# Altium PCB NBP-28 Rev 1.00.PCBDOC (part 1 of 6)
Units mil, origin at the board's own origin, x right, y up, seen from the top; angles counter-clockwise.
Board outline 2716.54 x 3917.15 mil, 8 copper layers (Top Layer, MidLayer3, MidLayer1, VCC, Gnd, VCCINT, MidLayer2, Bottom Layer), stack 59.043 mil thick; 229 components, 429 nets, 1584 pads, 1020 vias.
Unrouted connection lines stored in the file: 302.
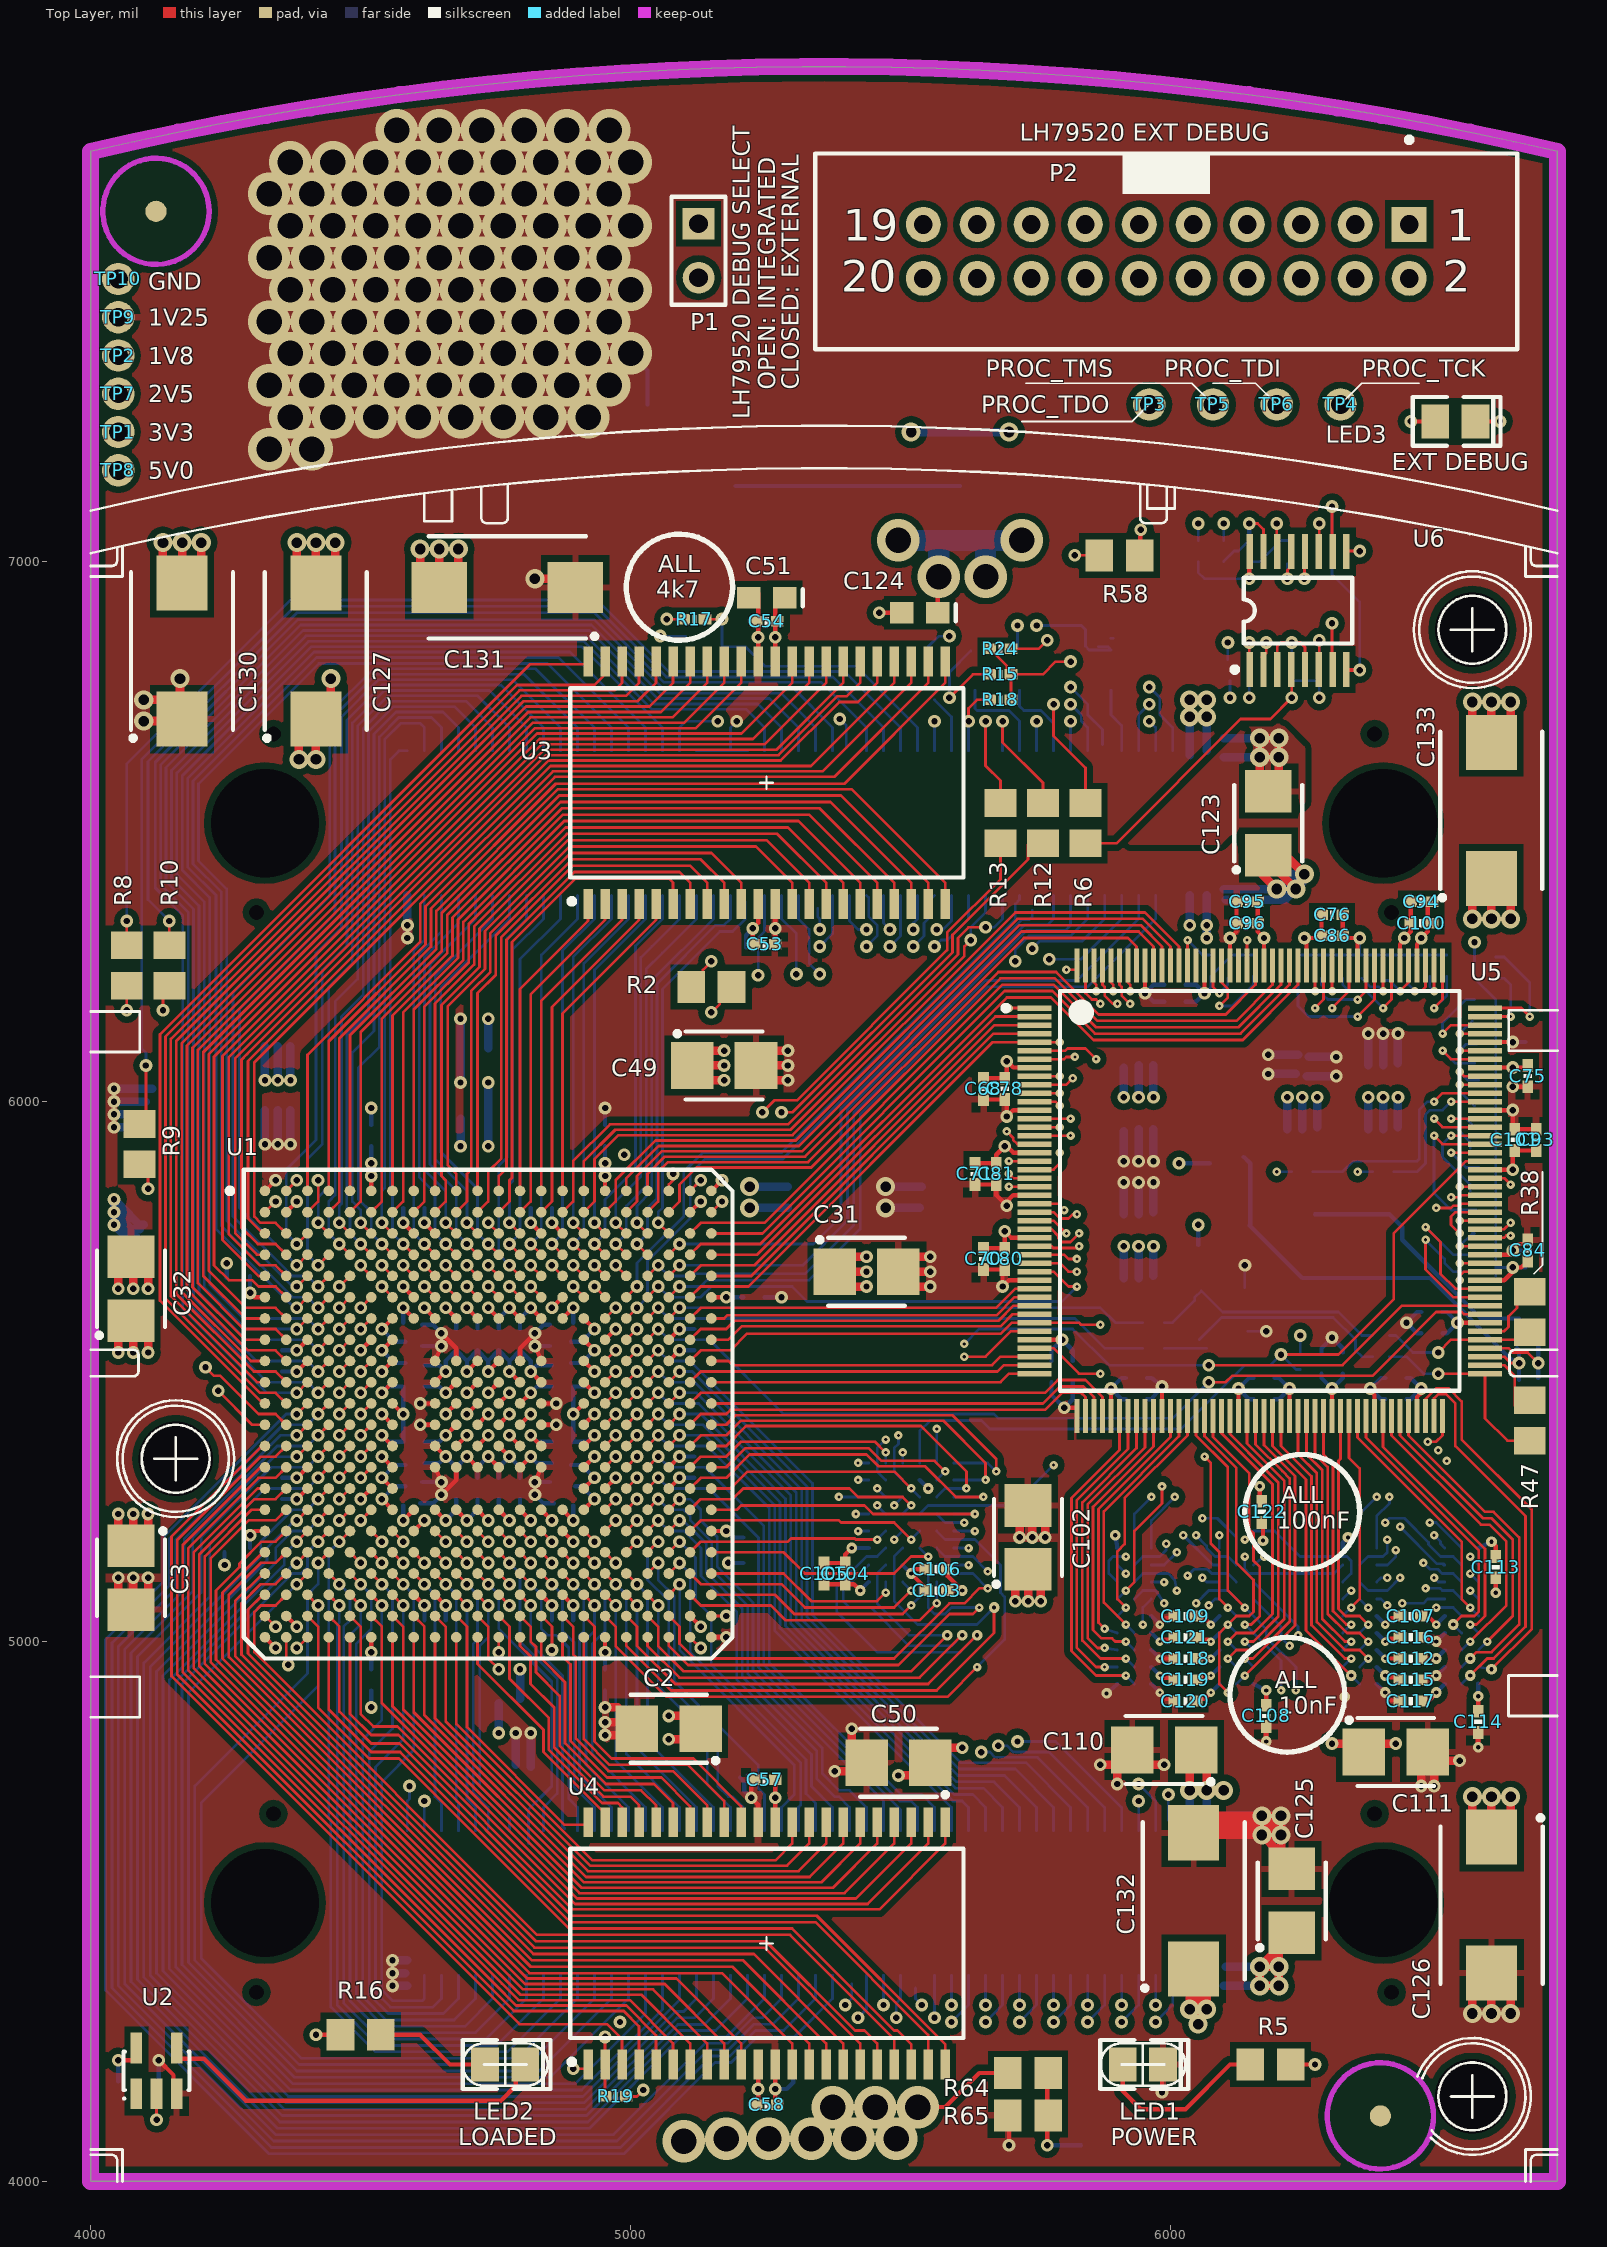
[diagram p0: Top Layer view]
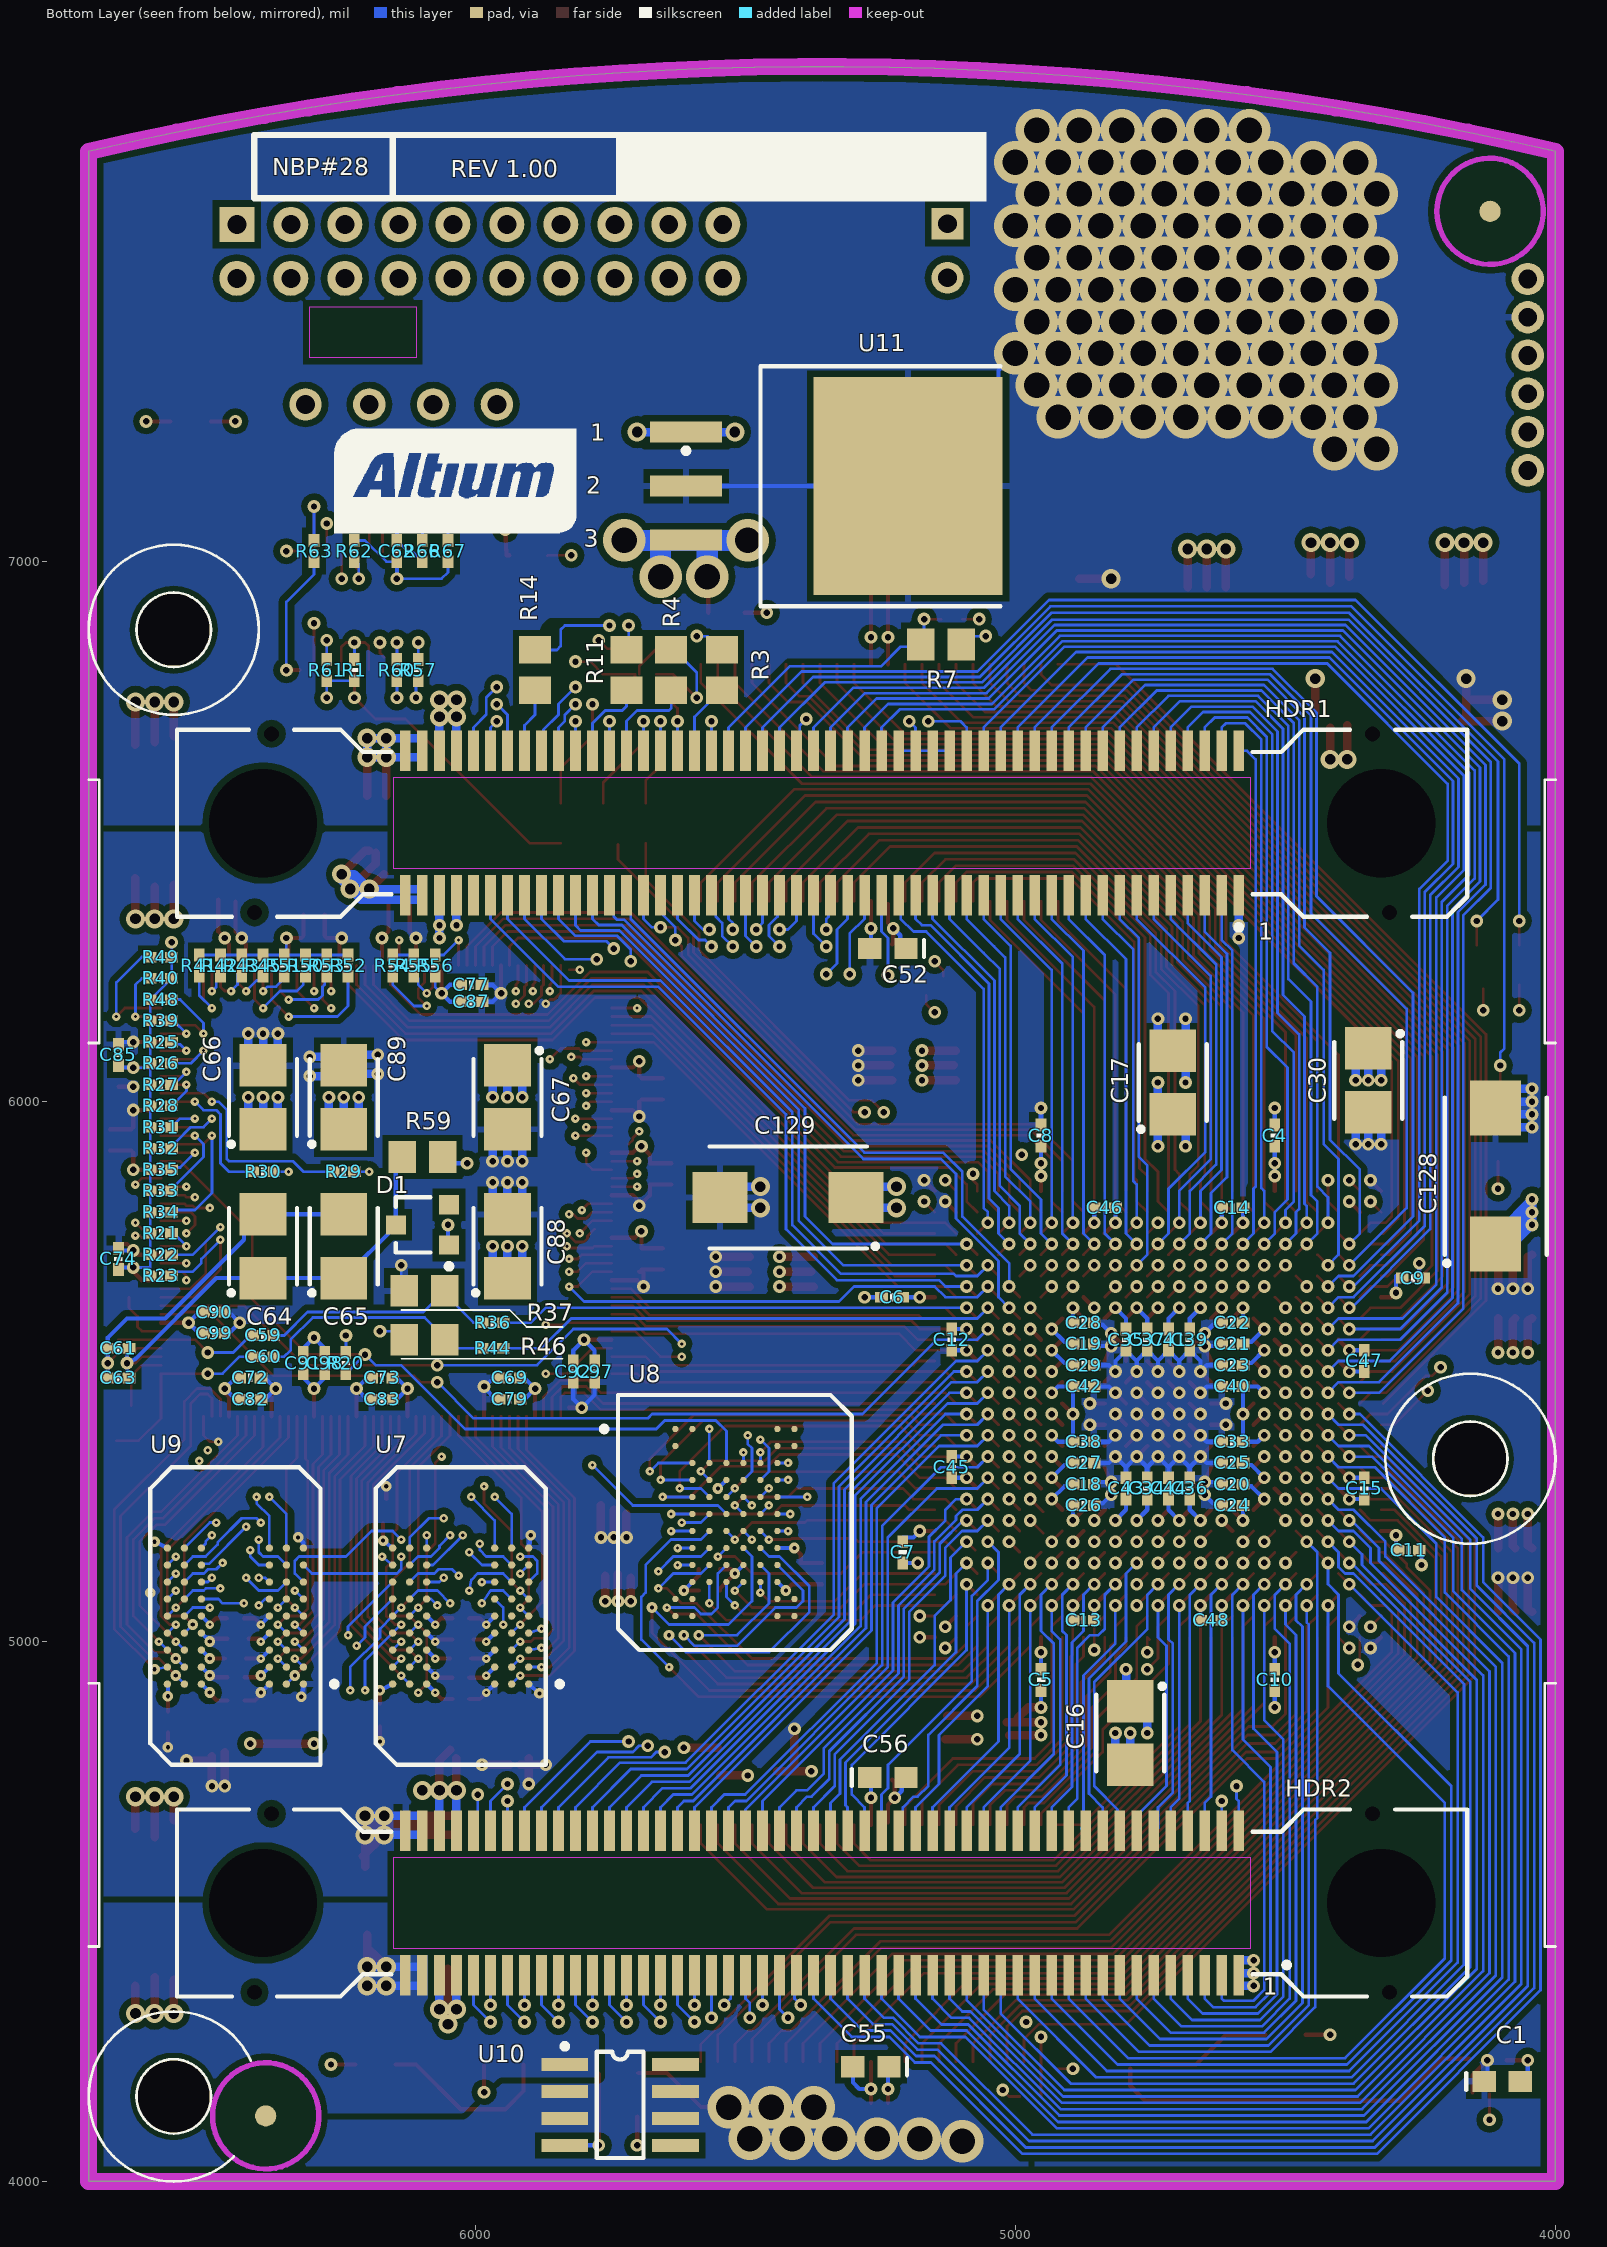
[diagram p1: Bottom Layer view, seen from below]
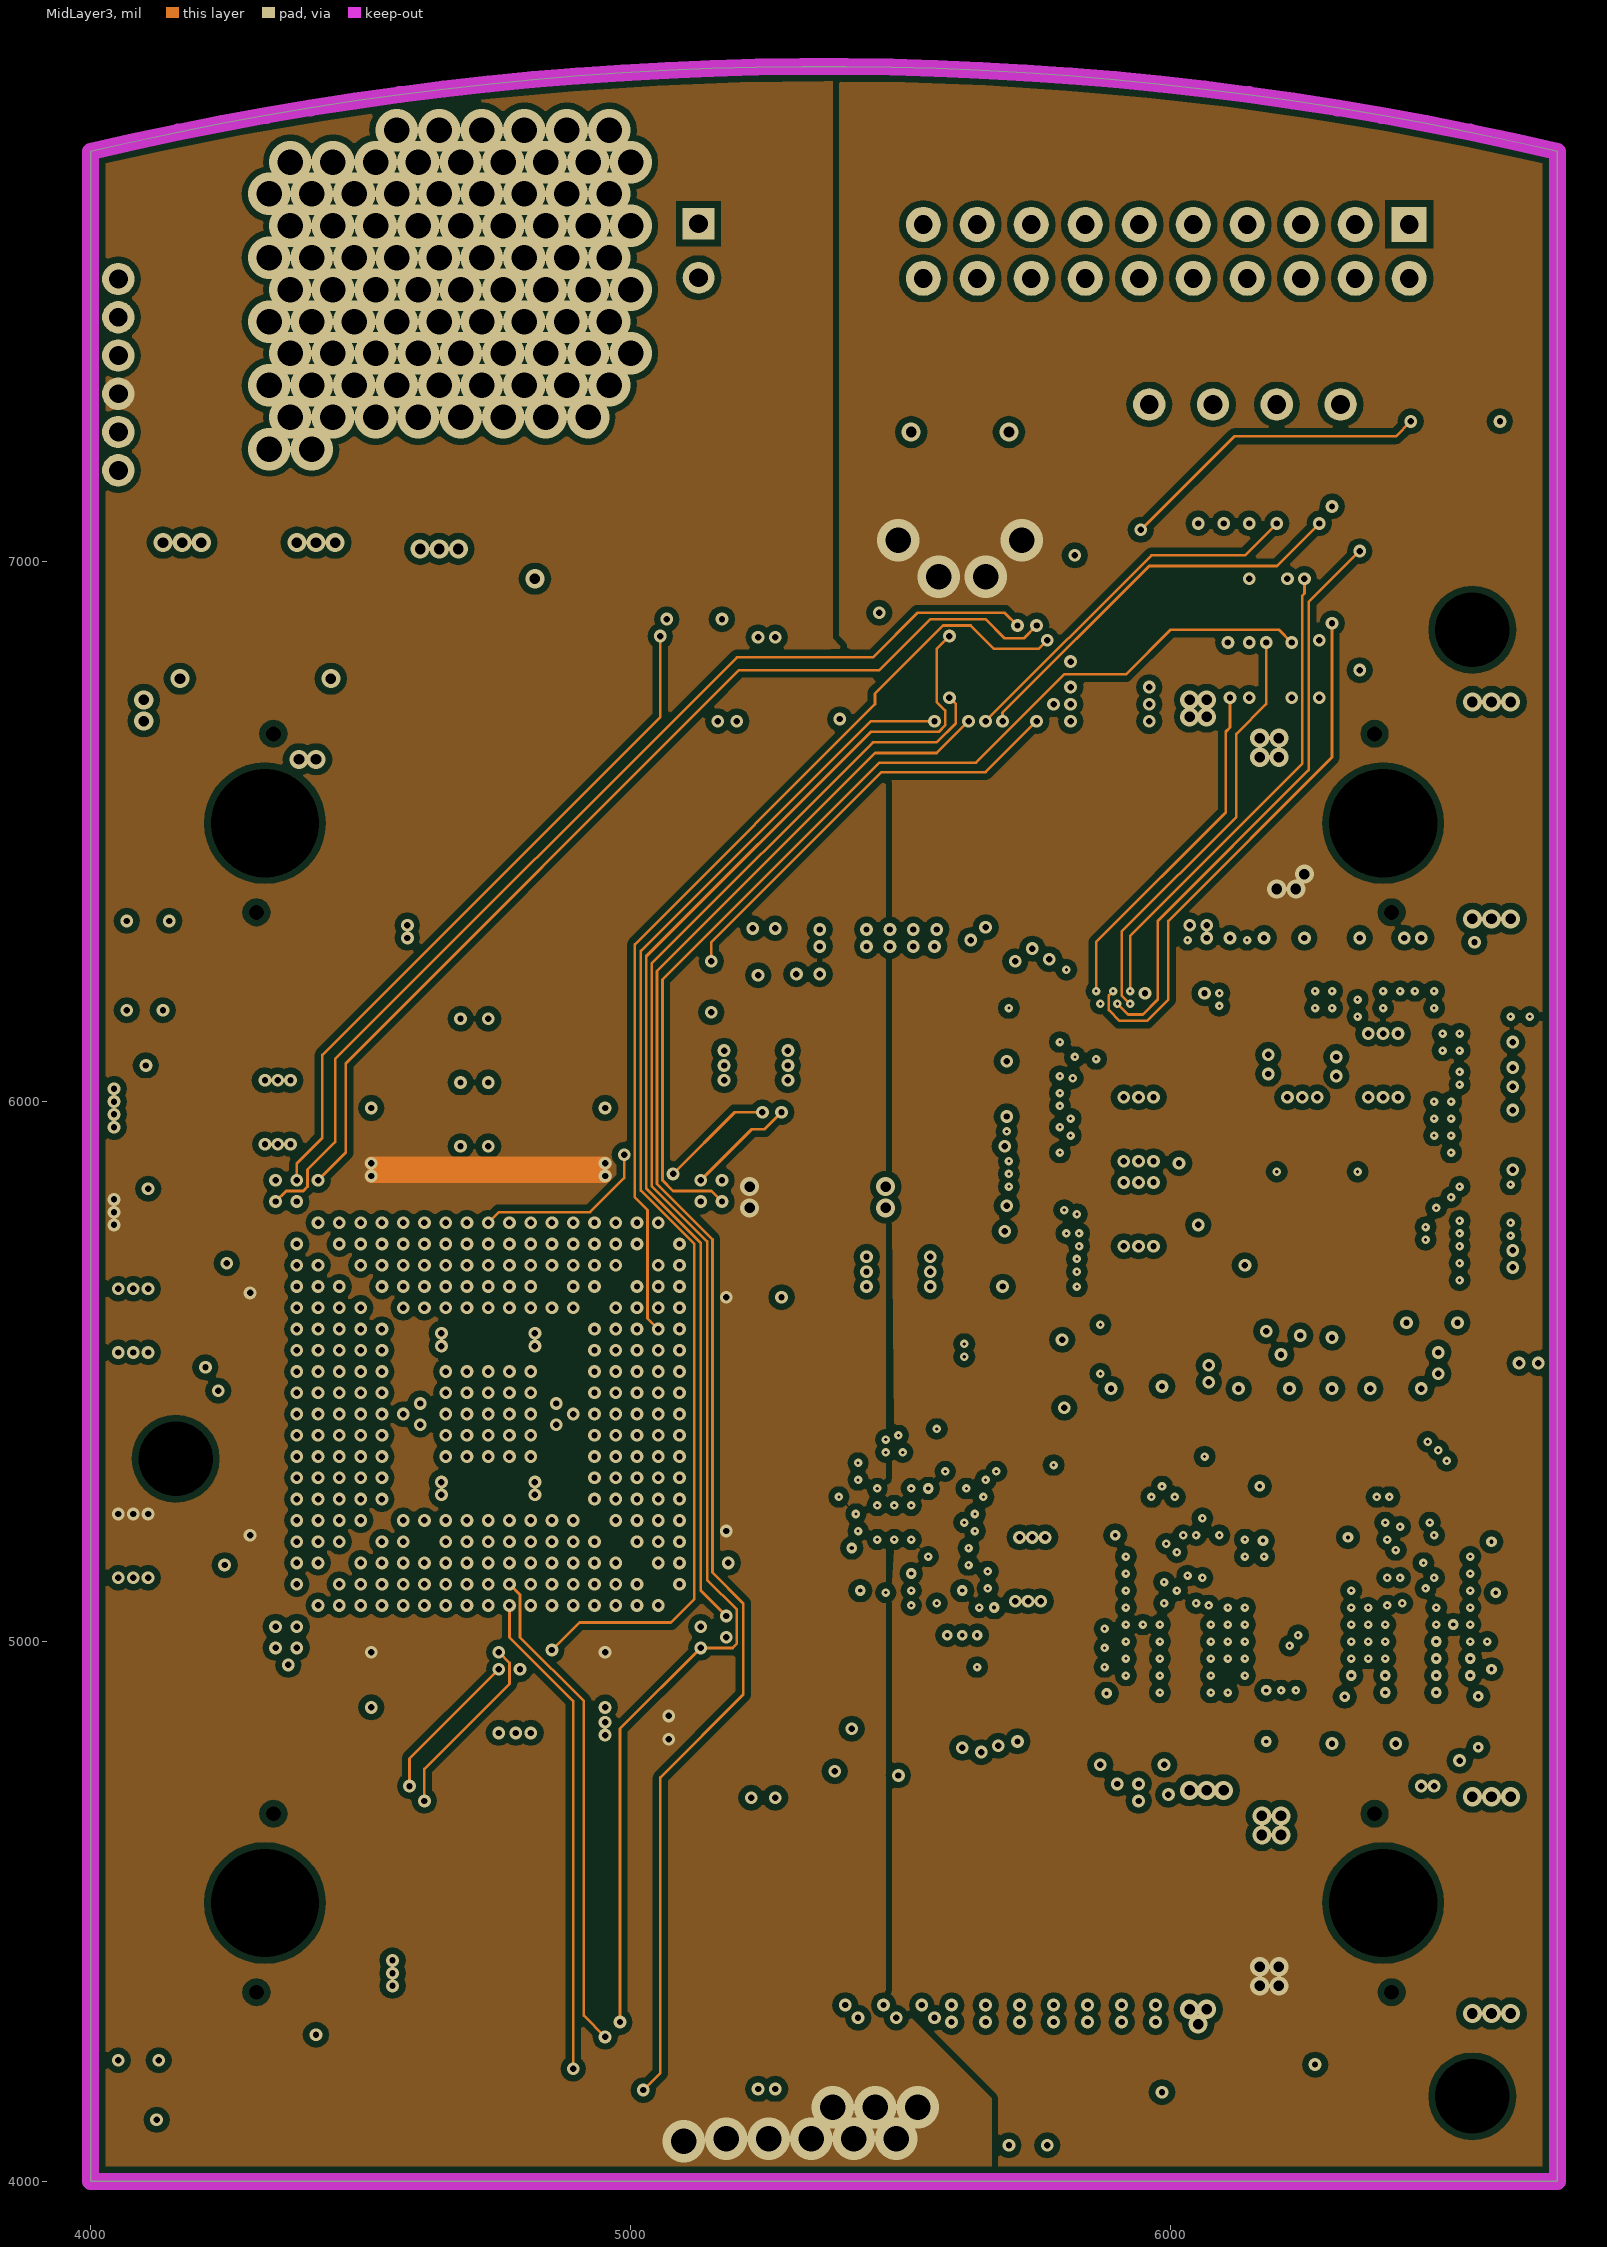
[diagram p2: MidLayer3]
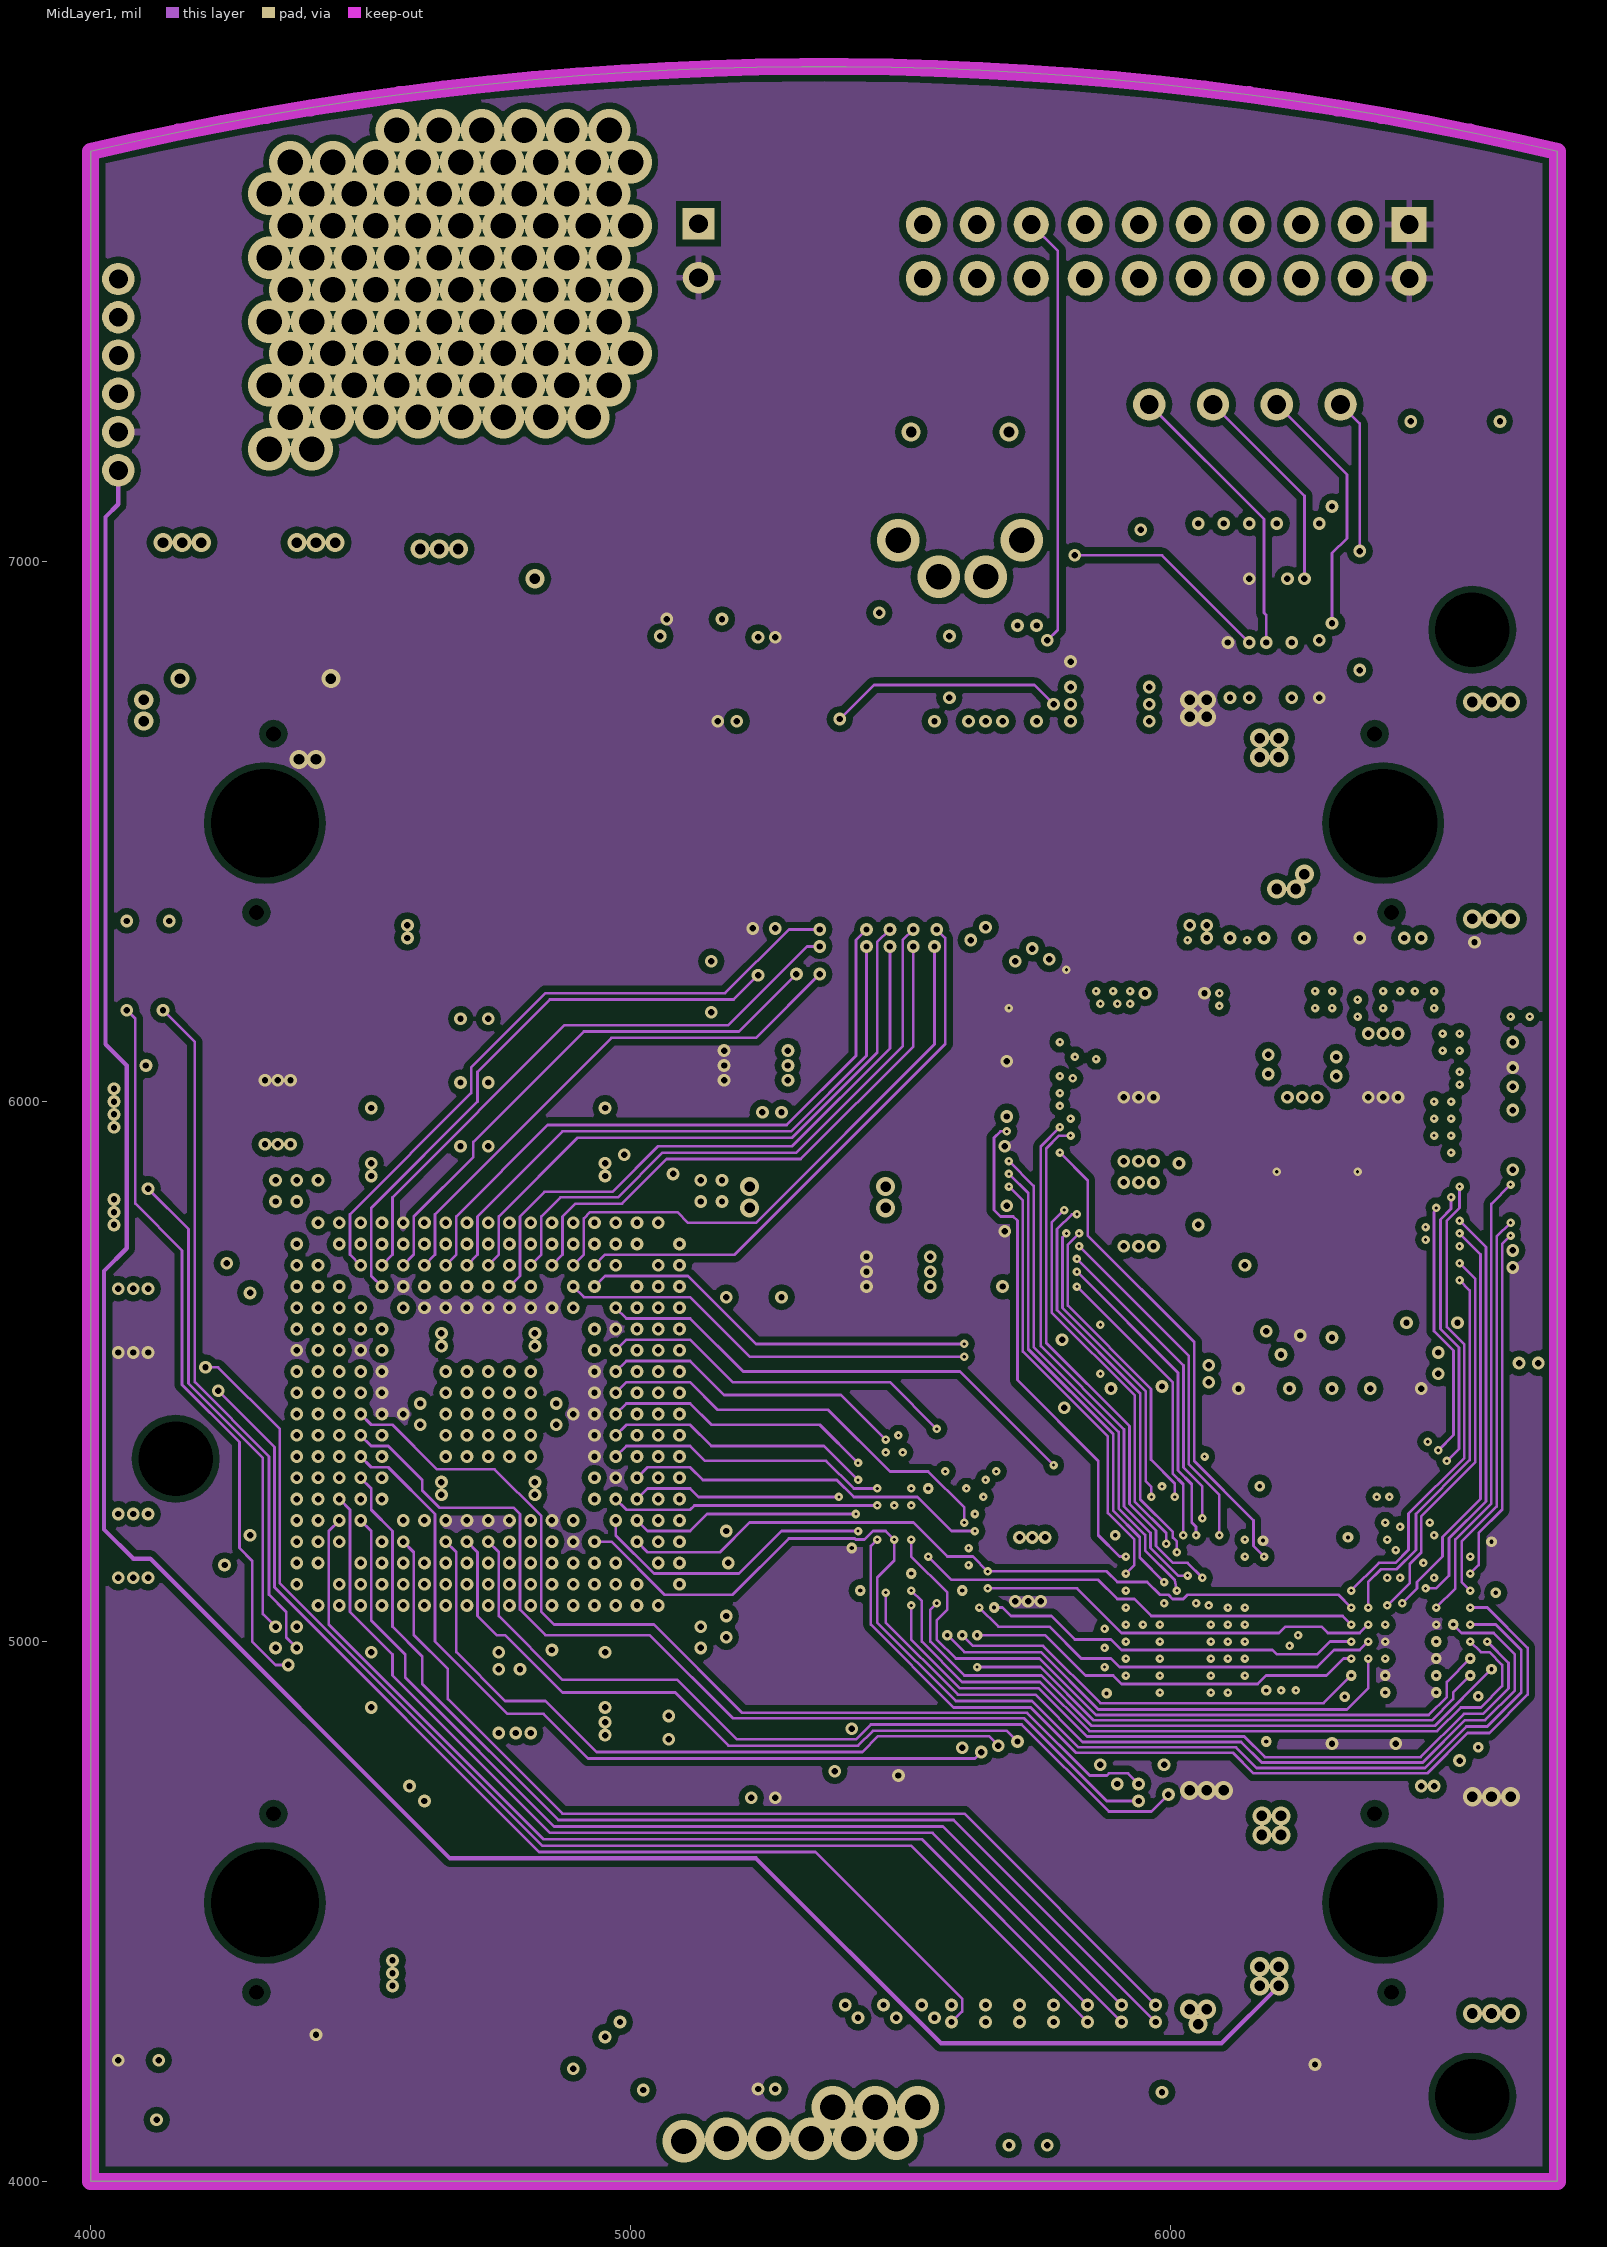
[diagram p3: MidLayer1]
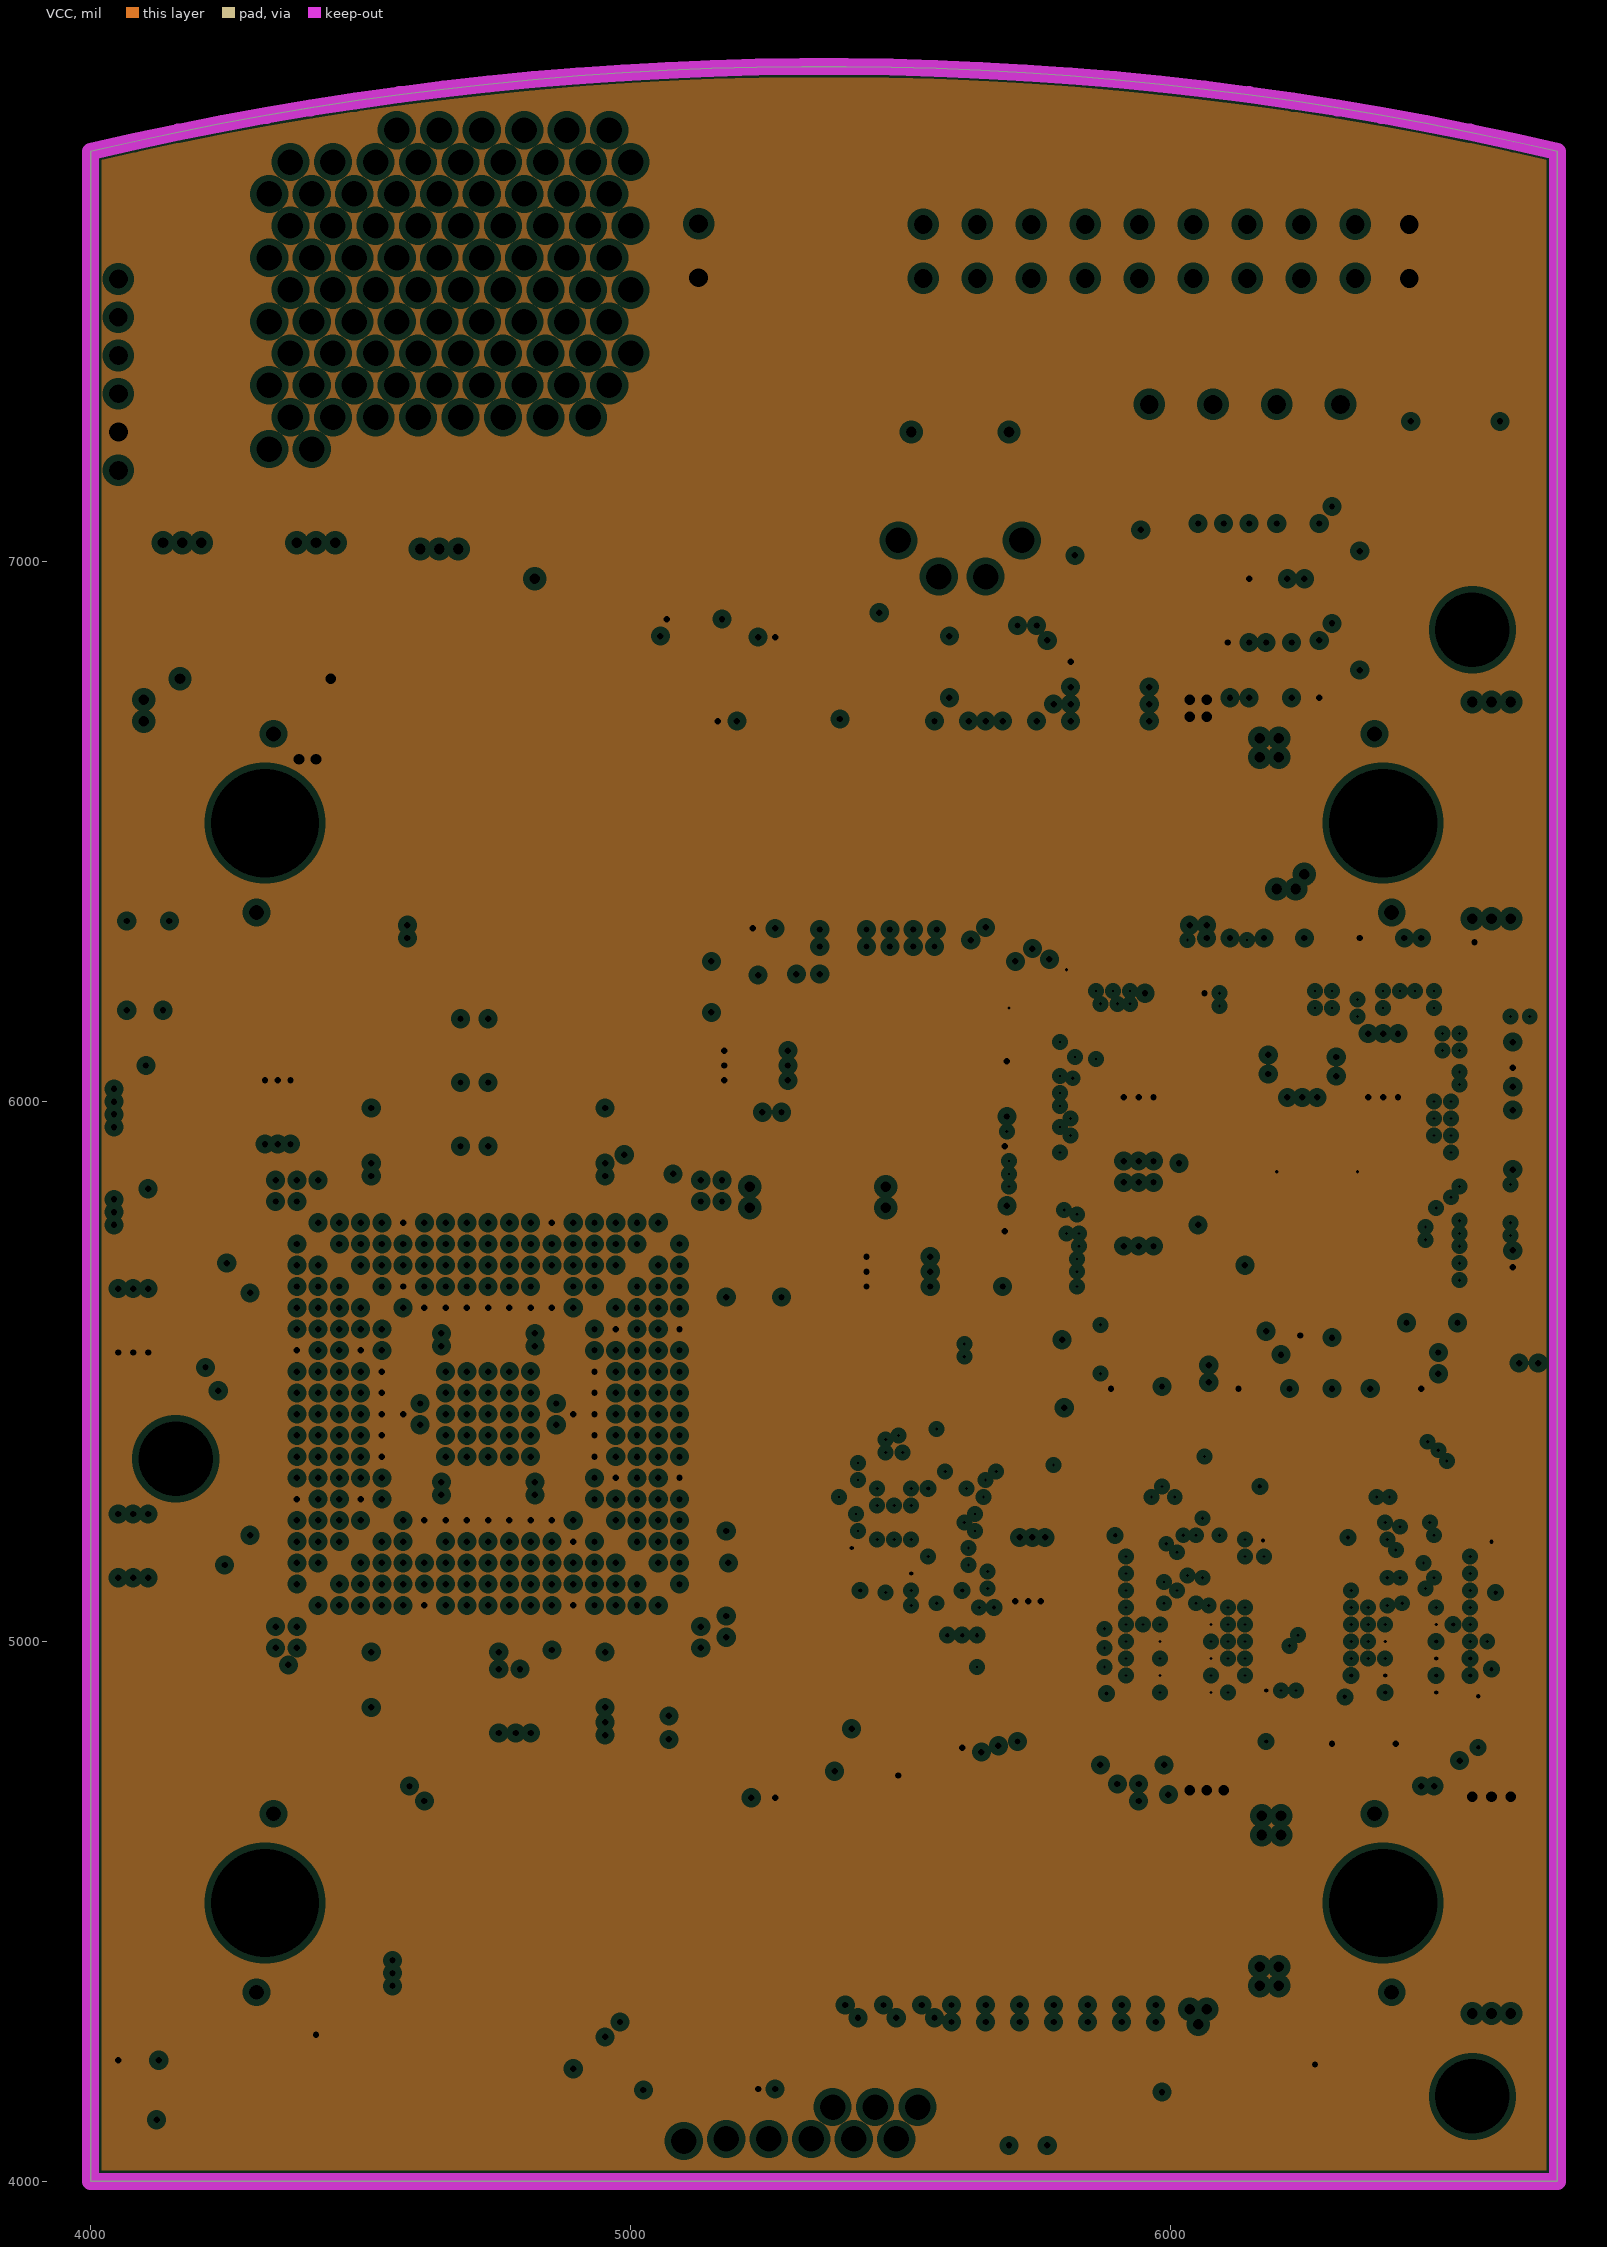
[diagram p4: VCC, clearances drawn from the general rule]
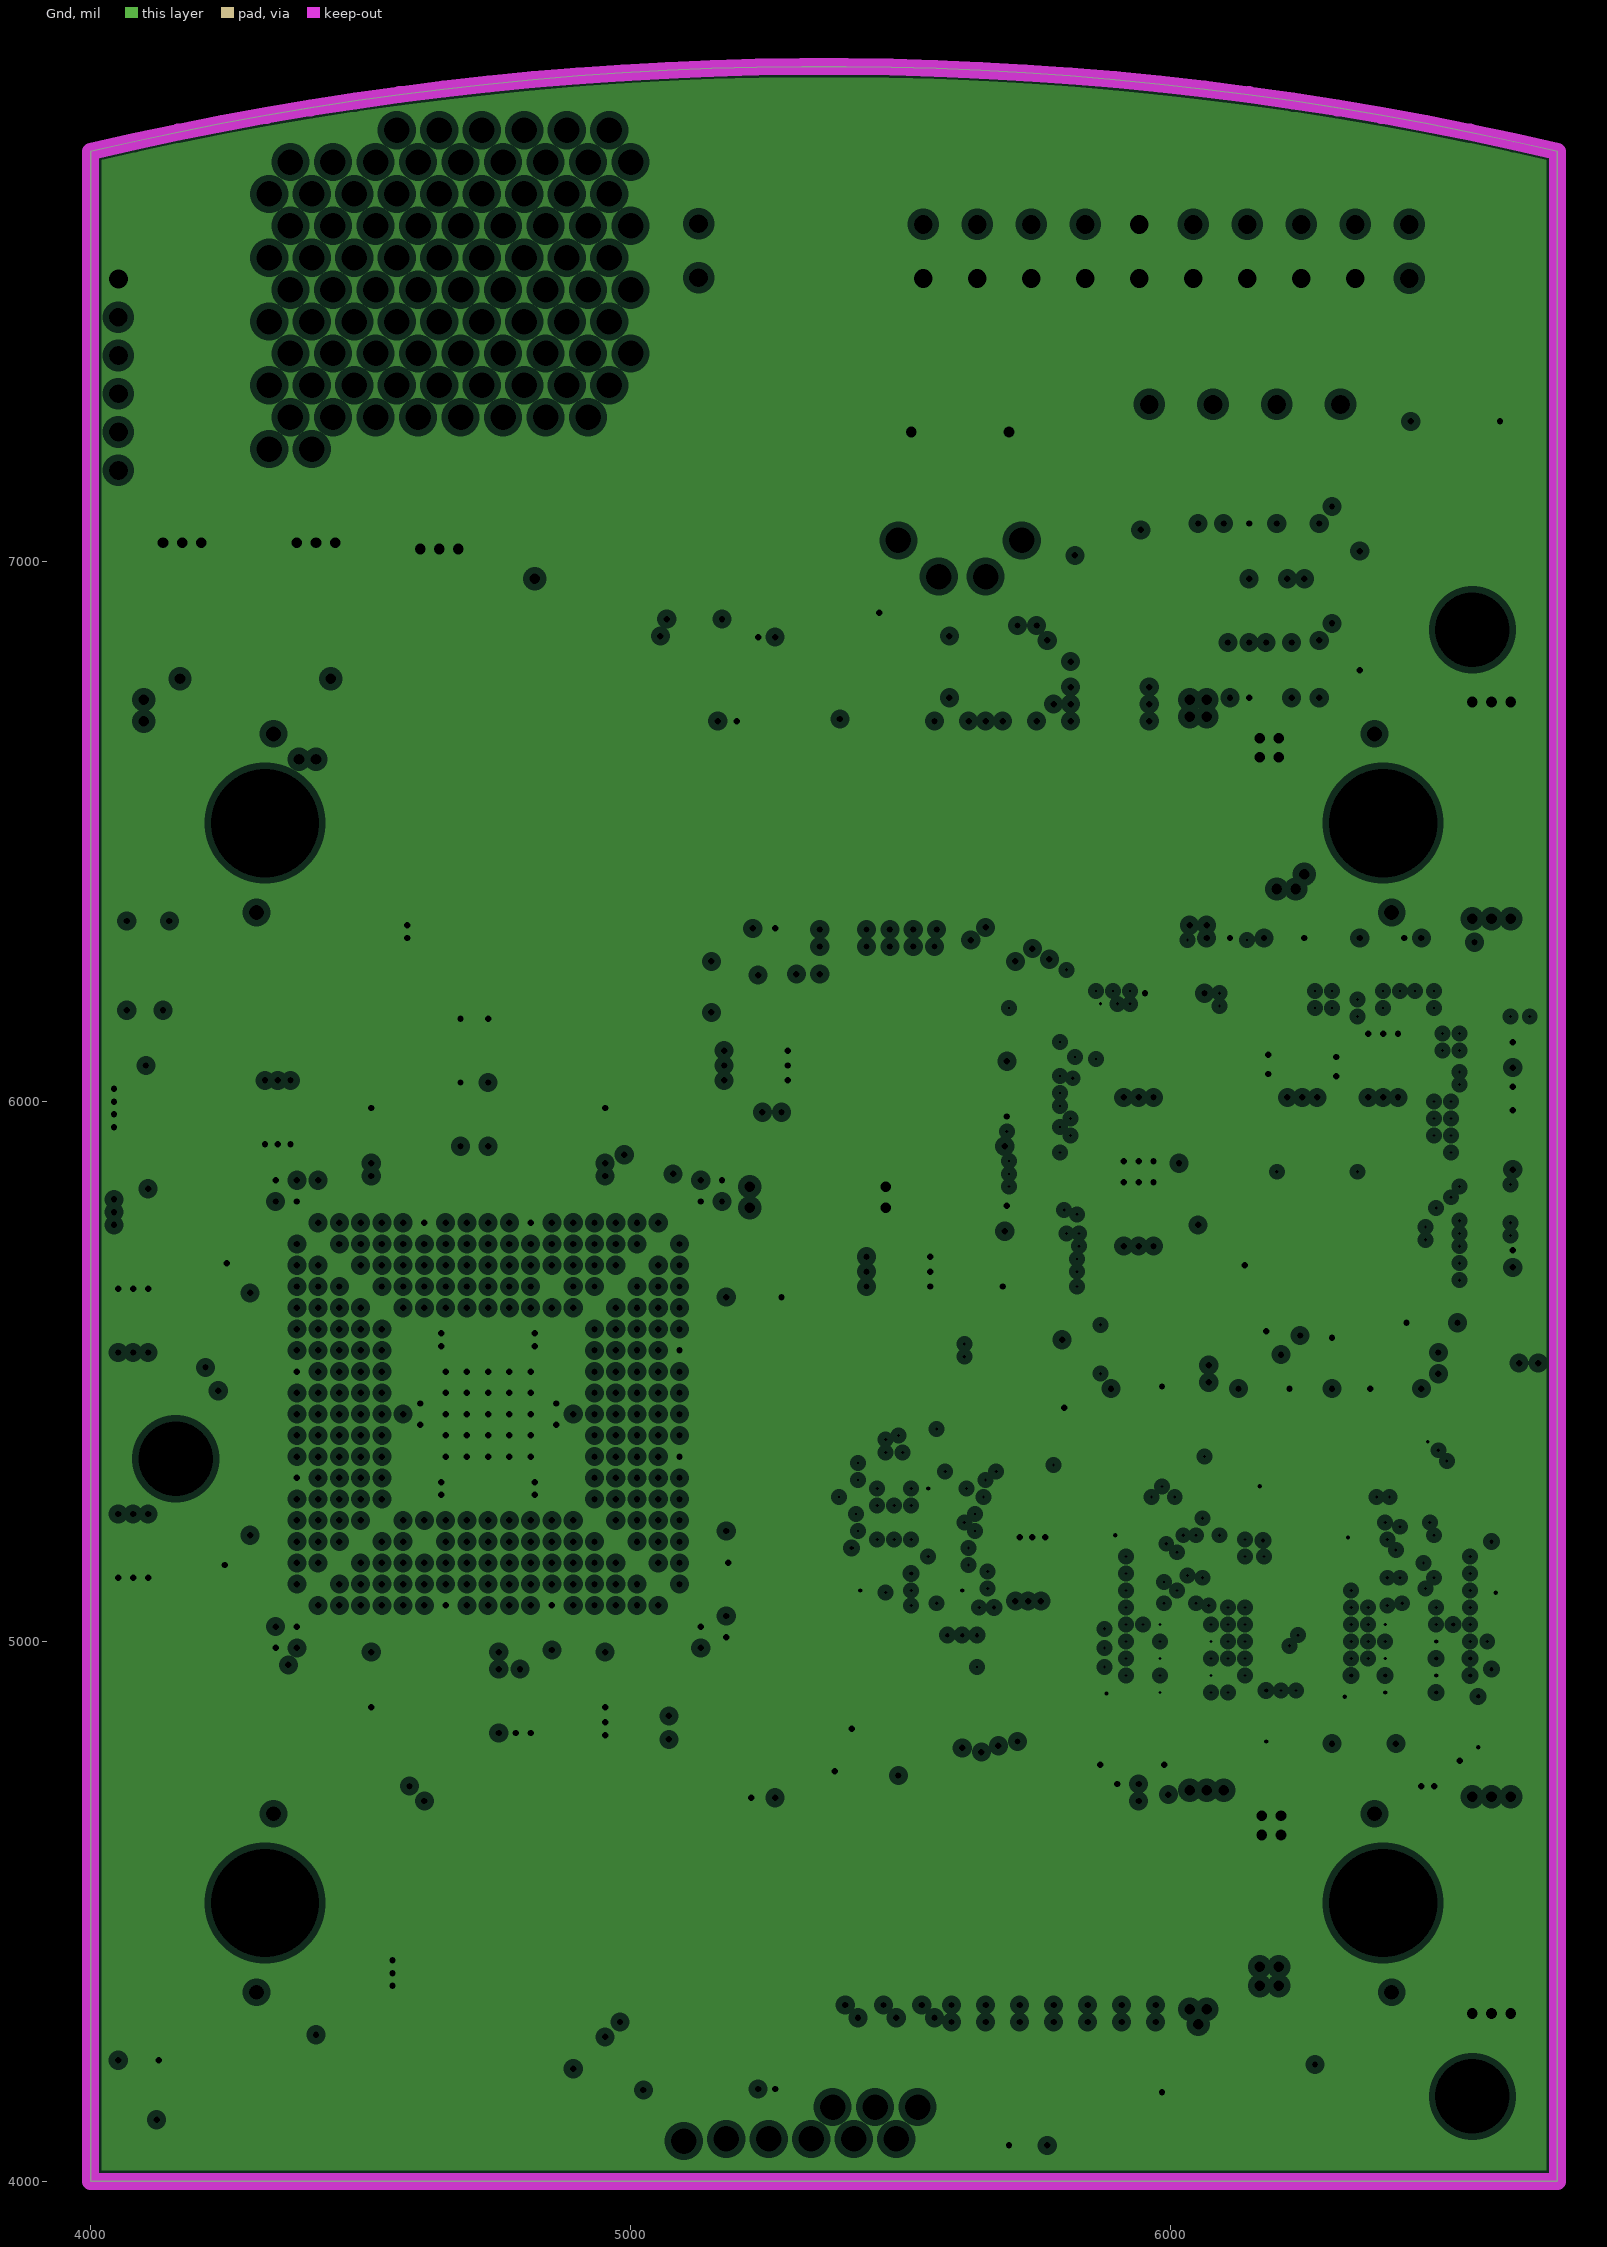
[diagram p5: Gnd, clearances drawn from the general rule]
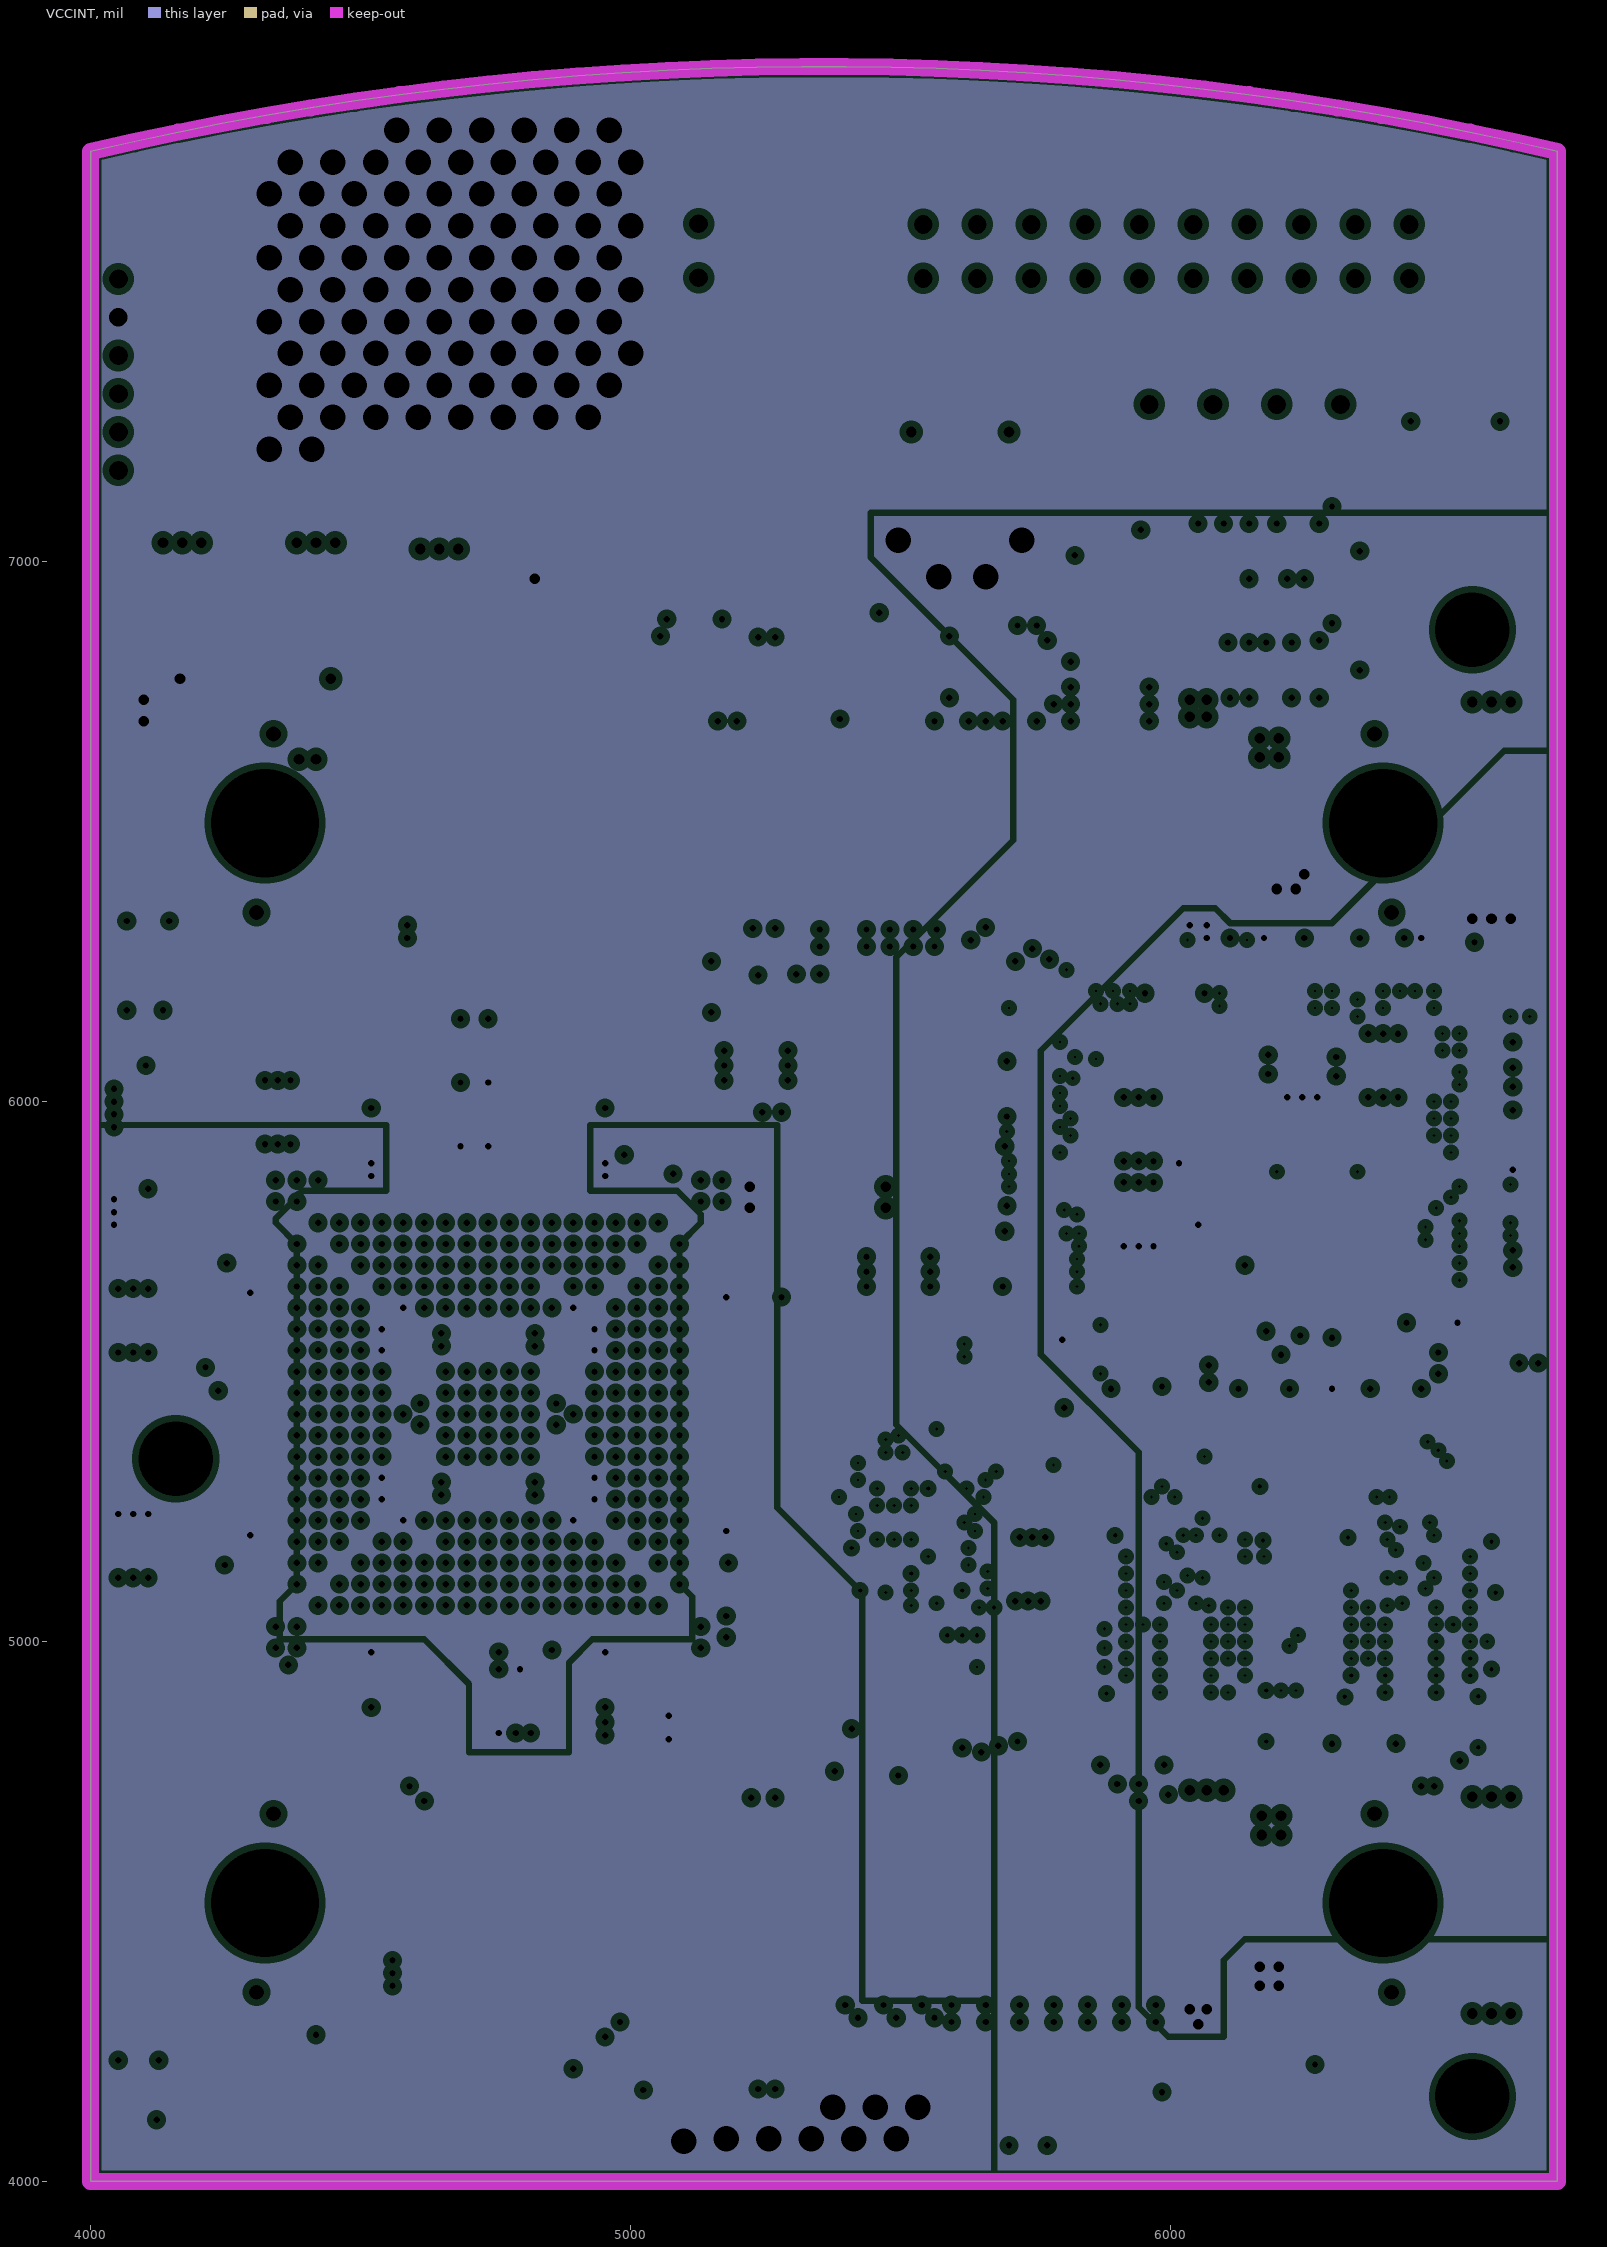
[diagram p6: VCCINT, clearances drawn from the general rule]
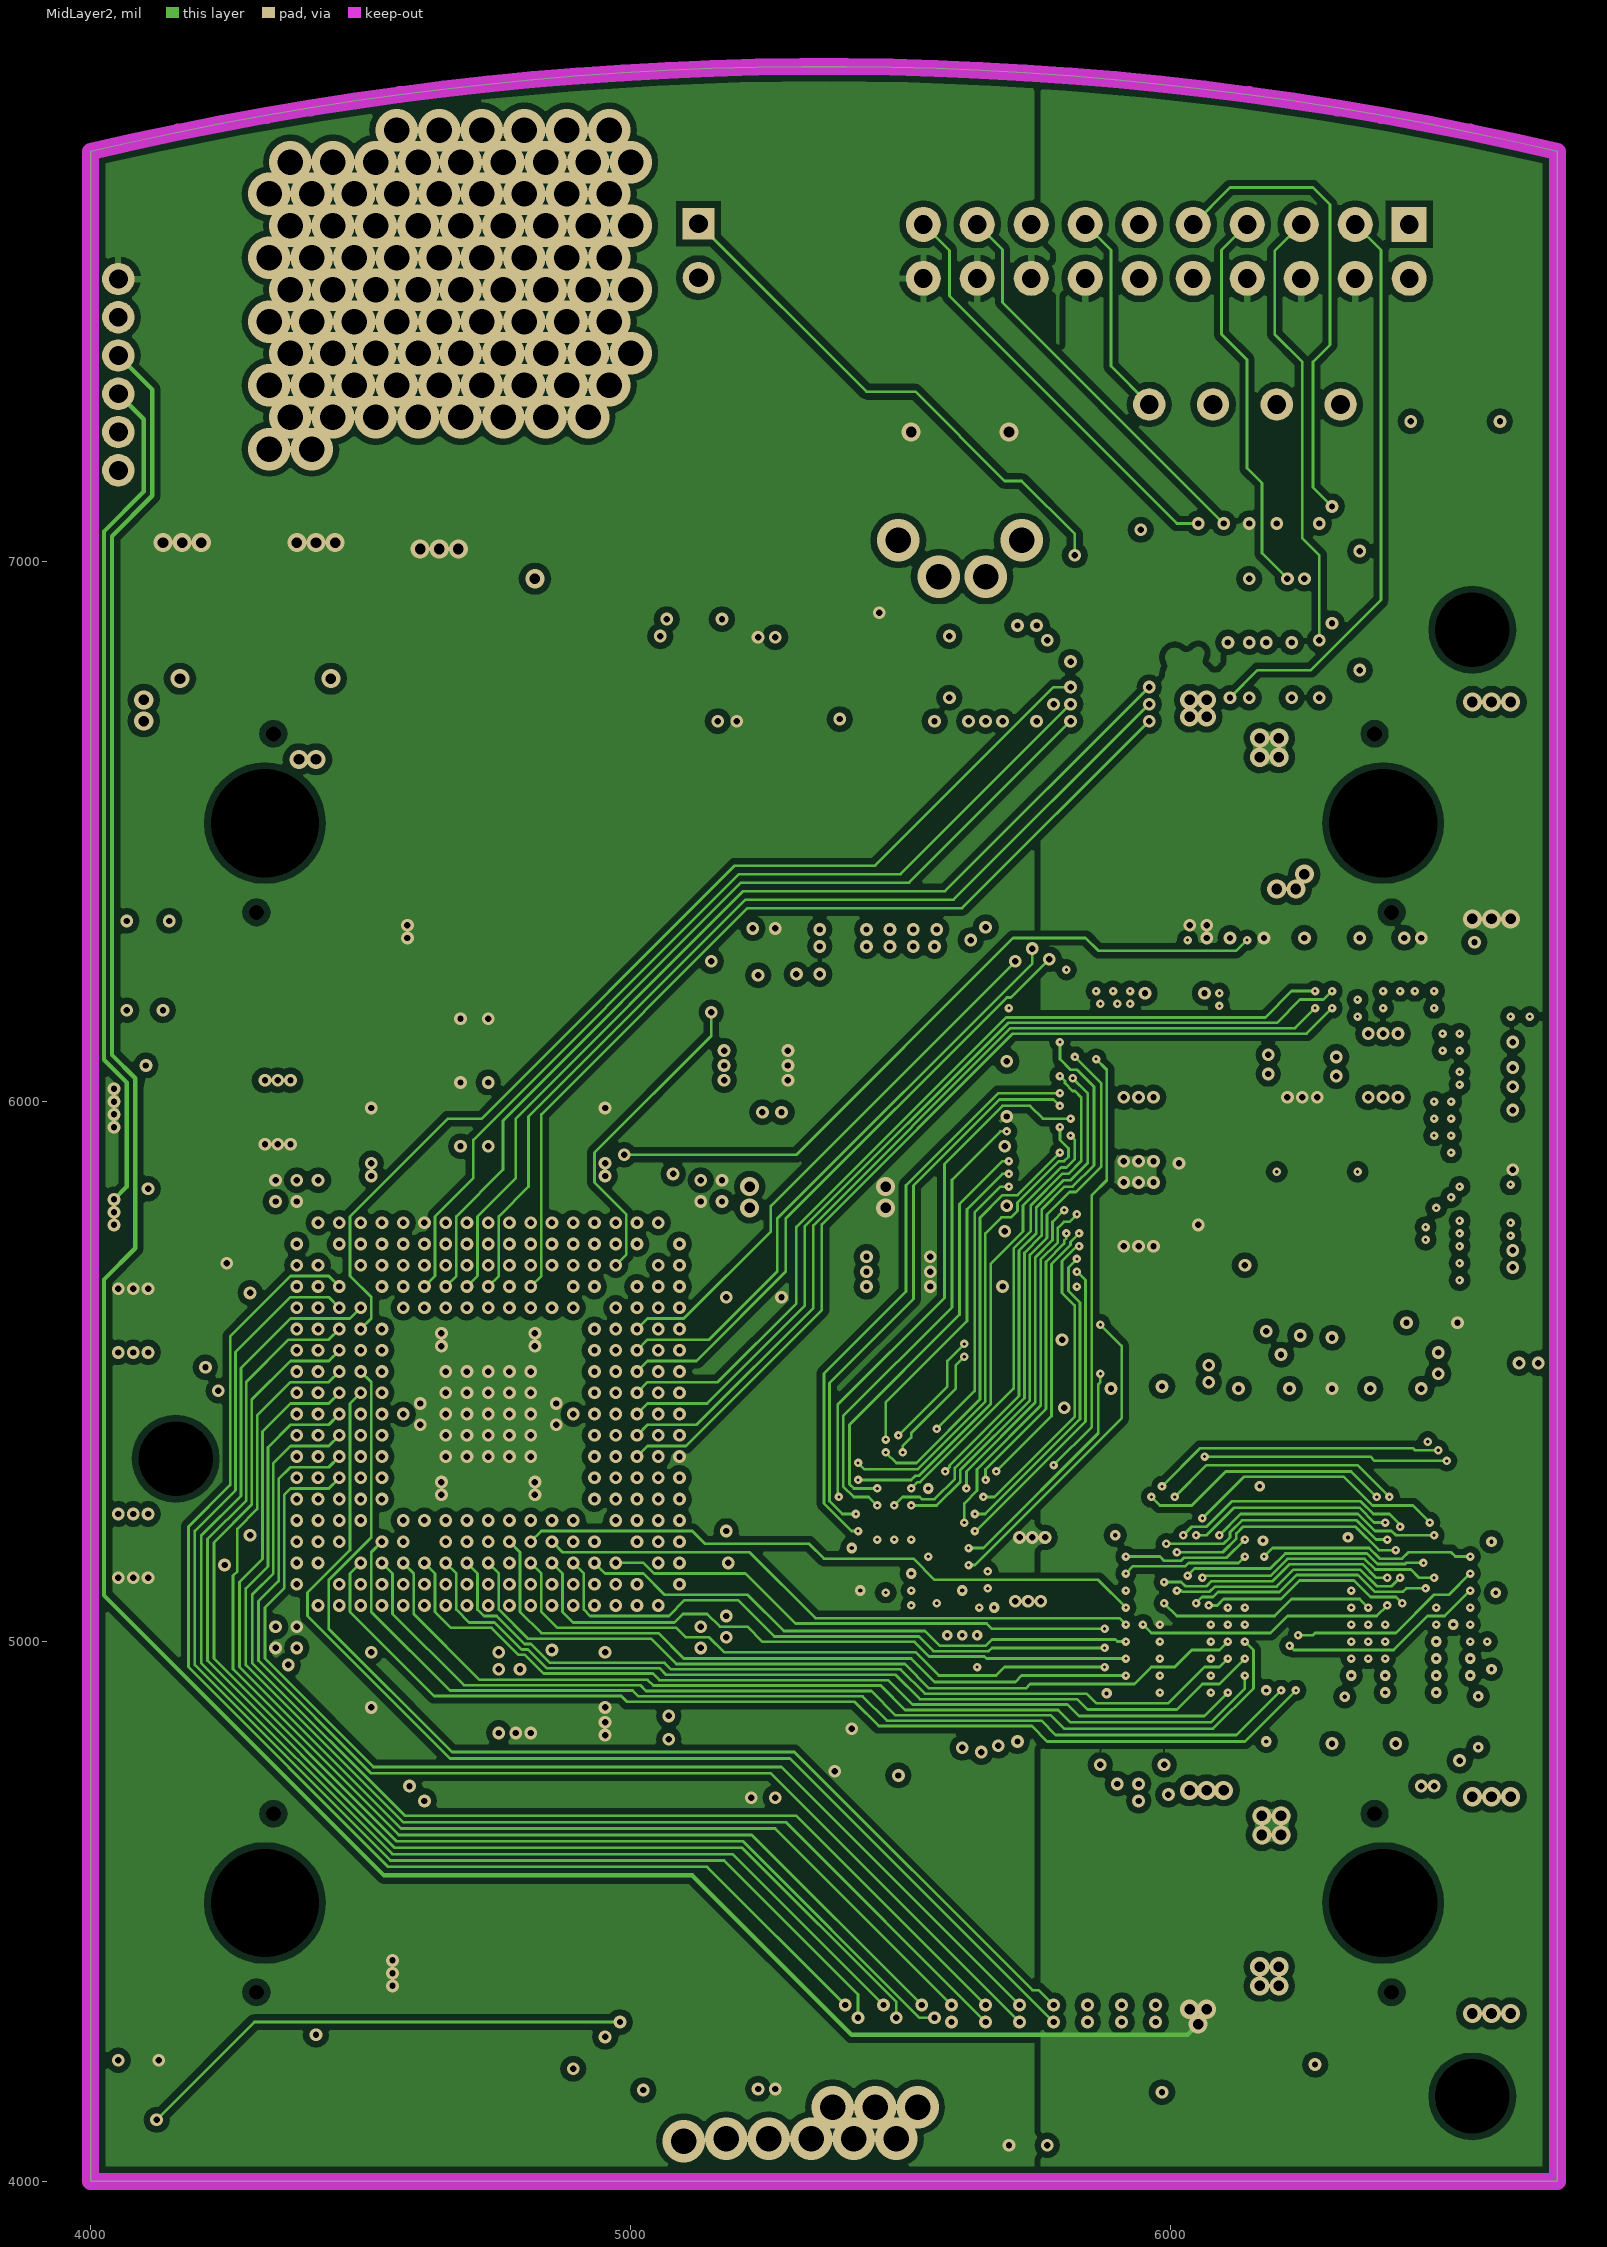
[diagram p7: MidLayer2]

## Layer stack, top to bottom
Top Layer: signal copper 0.7
Dielectric: prepreg 7, FR-4, Dk 4.8
MidLayer3: signal copper 0.7
Dielectric: core 8, FR-4, Dk 4.8
MidLayer1: signal copper 0.7
Dielectric: prepreg 7, FR-4, Dk 4.8
VCC: plane copper 1.417, net VCC3V3
Dielectric: core 8, FR-4, Dk 4.8
Gnd: plane copper 1.417, net GND
Dielectric: prepreg 7, FR-4, Dk 4.8
VCCINT: plane copper 0.709, net (Multiple Nets)
Dielectric: core 8, FR-4, Dk 4.8
MidLayer2: signal copper 0.7
Dielectric: prepreg 7, FR-4, Dk 4.8
Bottom Layer: signal copper 0.7

## Board outline
4000,4000 4000.02,7759.84 cw(c5358.27,1980.29) 6716.54,7759.84 6716.54,4000

## Design rules (kind name [scope] priority, off if disabled: settings)
Clearance "LQFP Clearance" [isPad and InComponent(U5) vs isPad and InComponent(U5)] p1: gap=5.91
Clearance Clearance_Polygons [InPolygon] p2: gap=11.81
Clearance "InnerLayer Track-Via Clearance" [OnMid And IsTrack vs IsVia] p3: gap=5
Clearance "Via-Via Clearance" [IsVia vs IsVia] p4: gap=7.87
Clearance "Pad-Pad Clearance Same Net" [IsPad vs IsPad] p5: gap=10
Clearance "Via-Pad Clearance" [IsVia vs IsPad] p6: gap=5
Clearance "General Clearance" [All] p7: gap=5
ComponentClearance [All] p1 off: gap=7.87 collisioncheckmode=3 verticalgap=10 showdistances=FALSE
FabricationTestPointUsage TestPointUsage [All] p1 off: valid=0 allowmultiple=FALSE
FabricationTestpoint Testpoint [All] p1 off: side=3 testpointundercomponent=TRUE minsize=40 maxsize=100 preferedsize=60 minholesize=0 maxholesize=40 preferedholesize=32 testpointgrid=1 allowsidetop=TRUE allowsidebottom=TRUE usegrid=TRUE gridtolerance=0.01
HoleSize [All] p1: absolutevalues=TRUE maxlimit=204.72 minlimit=5.91 maxpercent=80.000 minpercent=20.000
PlaneClearance [All] p1: clearance=11.81
PlaneConnect [All] p1: planeconnectstyle=Direct reliefexpansion=19.68 reliefentries=4 reliefconductorwidth=9.84 reliefairgap=9.84
PolygonConnect "PolygonConnect - High Current" [InNet('+5V') or InNet(VCC2V5)] p1: connectstyle=Direct reliefconductorwidth=10 reliefentries=4 polygonreliefangle="90 Angle"
PolygonConnect "PolygonConnect - Heatsink" [(HasFootprint('TO-263') AND InNet('VCC1V2'))] p2: connectstyle=Direct reliefconductorwidth=10 reliefentries=4 polygonreliefangle="90 Angle"
PolygonConnect [All] p3: connectstyle=Relief reliefconductorwidth=11.81 reliefentries=4 polygonreliefangle="90 Angle"
RoutingLayers [All] p1: top layer_v5=FALSE mid layer 1_v5=FALSE mid layer 2_v5=FALSE mid layer 3_v5=FALSE bottom layer_v5=FALSE
RoutingVias [All] p1: holewidth=11.81 width=23.62 viastyle="Through Hole" minholewidth=7.87 minwidth=23.62 maxholewidth=19.68 maxwidth=35.43
SilkscreenOverComponentPads [All] p1: minsilkscreentomaskgap=10
SolderMaskExpansion SolderMaskExpansion_0402 [HasFootprint('CC1005-0402')] p1: expansion=2.95
SolderMaskExpansion SolderMaskExpansion_Vias [IsVia] p2: expansion=-25.59
SolderMaskExpansion [All] p3: expansion=3.94
SupplyNets SupplyNets_GND [InNet('GND')] p1: voltage=0.000
SupplyNets SupplyNets_3V3 [InNet('VCC3V3')] p2: voltage=3.300
SupplyNets SupplyNets_2V5 [InNet('VCC2V5')] p3: voltage=2.500
SupplyNets SupplyNets_1V8 [InNet('VCC1V8')] p4: voltage=1.800
SupplyNets SupplyNets_1V2 [InNet('VCC1V2')] p5: voltage=1.200
SupplyNets SupplyNets_5V [InNet('+5V')] p6: voltage=5.000
Width [All] p1: maxlimit=98.43 minlimit=5 preferedwidth=5
20 further rules are at their usual default settings.

## Classes and differential pairs
component class TOP_SHEET: C123 C124 C125 C126 C127 C128 C129 C130 C131 C132 C133 R64 R65 TP7 TP8 TP9 TP10 TP11 TP12 U10 U11
net class SDRAM_DQM[3..0]: SDRAM_DQM0 SDRAM_DQM1 SDRAM_DQM2 SDRAM_DQM3
net class SRAM0_A[18..0]: SRAM0_A0 SRAM0_A1 SRAM0_A2 SRAM0_A3 SRAM0_A4 SRAM0_A5 SRAM0_A6 SRAM0_A7 SRAM0_A8 SRAM0_A9 SRAM0_A10 SRAM0_A11 SRAM0_A12 SRAM0_A13 SRAM0_A14 SRAM0_A15 SRAM0_A16 SRAM0_A17 SRAM0_A18
net class SRAM0_D[15..0]: SRAM0_D0 SRAM0_D1 SRAM0_D2 SRAM0_D3 SRAM0_D4 SRAM0_D5 SRAM0_D6 SRAM0_D7 SRAM0_D8 SRAM0_D9 SRAM0_D10 SRAM0_D11 SRAM0_D12 SRAM0_D13 SRAM0_D14 SRAM0_D15
net class SRAM1_A[18..0]: SRAM1_A0 SRAM1_A1 SRAM1_A2 SRAM1_A3 SRAM1_A4 SRAM1_A5 SRAM1_A6 SRAM1_A7 SRAM1_A8 SRAM1_A9 SRAM1_A10 SRAM1_A11 SRAM1_A12 SRAM1_A13 SRAM1_A14 SRAM1_A15 SRAM1_A16 SRAM1_A17 SRAM1_A18
net class SRAM1_D[15..0]: SRAM1_D0 SRAM1_D1 SRAM1_D2 SRAM1_D3 SRAM1_D4 SRAM1_D5 SRAM1_D6 SRAM1_D7 SRAM1_D8 SRAM1_D9 SRAM1_D10 SRAM1_D11 SRAM1_D12 SRAM1_D13 SRAM1_D14 SRAM1_D15
component class U_FPGA_RAM: C49 C50 C51 C52 C53 C54 C55 C56 C57 C58 U3 U4
component class U_FPGA: C1 C2 C3 C4 C5 C6 C7 C8 C9 C10 C11 C12 C13 C14 C15 C16 C17 C18 C19 C20 C21 C22 C23 C24 C25 C26 C27 C28 C29 C30 C31 C32 C33 C34 C35 C36 C37 C38 C39 C40 C41 C42 C43 C44 C45 C46 C47 C48 HDR1 HDR2 LED1 LED2 R1 R2 R3 R4 R5 R6 R7 R8 R9 R10 R11 R12 R13 R14 R15 R16 R17 R18 R19 TP1 TP2 U1 U2
component class U_PROCESSOR_MEMORIES: C102 C103 C104 C105 C106 C107 C108 C109 C110 C111 C112 C113 C114 C115 C116 C117 C118 C119 C120 C121 C122 U7 U8 U9
component class U_PROCESSOR: C59 C60 C61 C62 C63 C64 C65 C66 C67 C68 C69 C70 C71 C72 C73 C74 C75 C76 C77 C78 C79 C80 C81 C82 C83 C84 C85 C86 C87 C88 C89 C90 C91 C92 C93 C94 C95 C96 C97 C98 C99 C100 C101 D1 LED3 P1 P2 R20 R21 R22 R23 R24 R25 R26 R27 R28 R29 R30 R31 R32 R33 R34 R35 R36 R37 R38 R39 R40 R41 R42 R43 R44 R45 R46 R47 R48 R49 R50 R51 R52 R53 R54 R55 R56 R57 R58 R59 R60 R61 R62 R63 R66 R67 TP3 TP4 TP5 TP6 U5 U6
net class A[25..0]: A0 A1 A2 A3 A4 A5 A6 A7 A8 A9 A10 A11 A12 A13 A14 A15 A16 A17 A18 A19 A20 A21 A22 A23 A24 A25
net class D[31..0]: D0 D1 D2 D3 D4 D5 D6 D7 D8 D9 D10 D11 D12 D13 D14 D15 D16 D17 D18 D19 D20 D21 D22 D23 D24 D25 D26 D27 D28 D29 D30 D31
net class INT[4..0]: INT0 INT1 INT2 INT3 INT4
net class NBLE[3..0]: NBLE0 NBLE1 NBLE2 NBLE3
net class NCS[5..0]: NCS0 NCS1 NCS2 NCS3 NCS4 NCS5

## Components (designator, comment, footprint, x,y, rotation, side; value= is the part's Value field where it differs from the comment)
C1 "220nF 10V" CAPC1608 4098.43,4185.04 r180 bottom
C2 "10uF 16V" CAPC3528 5070.87,4838.58 r180 top
C3 "10uF 16V" CAPC3528 4074.8,5118.11 r270 top
C4 "0.1uF 16V" CAPC1005 4519.69,5937.01 r90 bottom
C5 "0.1uF 16V" CAPC1005 4952.76,4929.13 r270 bottom
C6 "10nF 16V" CAPC1005 5228.35,5637.8 r0 bottom
C7 "10nF 16V" CAPC1005 5208.66,5165.35 r270 bottom
C8 "10nF 16V" CAPC1005 4952.76,5937.01 r90 bottom
C9 "10nF 16V" CAPC1005 4263.78,5673.23 r180 bottom
C10 "10nF 16V" CAPC1005 4519.69,4929.13 r270 bottom
C11 "10nF 16V" CAPC1005 4271.65,5169.29 r180 bottom
C12 "0.1uF 16V" CAPC1005 5118.11,5559.06 r270 bottom
C13 "0.1uF 16V" CAPC1005 4874.02,5039.37 r180 bottom
C14 "0.1uF 16V" CAPC1005 4598.43,5803.15 r0 bottom
C15 "0.1uF 16V" CAPC1005 4354.33,5283.47 r90 bottom
C16 "10uF 16V" CAPC3528 4787.4,4830.71 r270 bottom
C17 "10uF 16V" CAPC3528 4708.66,6035.43 r90 bottom
C18 "0.1uF 16V" CAPC1005 4874.02,5291.34 r180 bottom
C19 "0.1uF 16V" CAPC1005 4874.02,5551.18 r180 bottom
C20 "0.1uF 16V" CAPC1005 4598.43,5291.34 r0 bottom
C21 "0.1uF 16V" CAPC1005 4598.43,5551.18 r0 bottom
C22 "10nF 16V" CAPC1005 4598.43,5590.55 r0 bottom
C23 "10nF 16V" CAPC1005 4598.43,5511.81 r0 bottom
C24 "10nF 16V" CAPC1005 4598.43,5251.97 r0 bottom
C25 "10nF 16V" CAPC1005 4598.43,5330.71 r0 bottom
C26 "10nF 16V" CAPC1005 4874.02,5251.97 r180 bottom
C27 "10nF 16V" CAPC1005 4874.02,5330.71 r180 bottom
C28 "10nF 16V" CAPC1005 4874.02,5590.55 r180 bottom
C29 "10nF 16V" CAPC1005 4874.02,5511.81 r180 bottom
C30 "10uF 16V" CAPC3528 4346.46,6039.37 r270 bottom
C31 "10uF 16V" CAPC3528 5437.01,5685.04 r0 top
C32 "10uF 16V" CAPC3528 4074.8,5653.54 r90 top
C33 "0.1uF 16V" CAPC1005 4598.43,5370.08 r0 bottom
C34 "0.1uF 16V" CAPC1005 4755.91,5283.47 r90 bottom
C35 "0.1uF 16V" CAPC1005 4795.28,5559.06 r270 bottom
C36 "0.1uF 16V" CAPC1005 4677.17,5283.47 r90 bottom
C37 "10nF 16V" CAPC1005 4755.91,5559.06 r270 bottom
C38 "10nF 16V" CAPC1005 4874.02,5370.08 r180 bottom
C39 "10nF 16V" CAPC1005 4677.17,5559.06 r270 bottom
C40 "10nF 16V" CAPC1005 4598.43,5472.44 r0 bottom
C41 "0.1uF 16V" CAPC1005 4716.54,5559.06 r270 bottom
C42 "0.1uF 16V" CAPC1005 4874.02,5472.44 r180 bottom
C43 "10nF 16V" CAPC1005 4795.28,5283.47 r90 bottom
C44 "10nF 16V" CAPC1005 4716.54,5283.47 r90 bottom
C45 "10nF 16V" CAPC1005 5118.11,5322.84 r90 bottom
C46 "10nF 16V" CAPC1005 4834.65,5803.15 r180 bottom
C47 "10nF 16V" CAPC1005 4354.33,5519.69 r270 bottom
C48 "10nF 16V" CAPC1005 4637.8,5039.37 r0 bottom
C49 "10uF 16V" CAPC3528 5173.23,6066.93 r0 top
C50 "10uF 16V" CAPC3528 5496.06,4775.59 r180 top
C51 "220nF 10V" CAPC1608 5251.97,6933.07 r180 top
C52 "220nF 10V" CAPC1608 5236.22,6283.47 r0 bottom
C53 "10nF 16V" CAPC1005 5248.03,6291.34 r0 top
C54 "10nF 16V" CAPC1005 5251.97,6889.76 r180 top
C55 "220nF 10V" CAPC1608 5267.72,4212.6 r0 bottom
C56 "220nF 10V" CAPC1608 5236.22,4748.03 r180 bottom
C57 "10nF 16V" CAPC1005 5248.03,4744.1 r180 top
C58 "10nF 16V" CAPC1005 5251.97,4141.73 r0 top
C59 "0.1uF 16V" CAPC1005 6393.7,5566.93 r0 bottom
C60 "0.1uF 16V" CAPC1005 6393.7,5527.56 r0 bottom
C61 "10nF 16V" CAPC1005 6661.42,5543.31 r0 bottom
C62 "0.1uF 16V" CAPC1005 6145.67,7019.69 r90 bottom
C63 "0.1uF 16V" CAPC1005 6661.42,5488.19 r0 bottom
C64 "10uF 16V" CAPC3528 6393.7,5732.28 r90 bottom
C65 "10uF 16V" CAPC3528 6244.1,5732.28 r90 bottom
C66 "10uF 16V" CAPC3528 6393.7,6007.87 r90 bottom
C67 "10uF 16V" CAPC3528 5940.95,6007.87 r270 bottom
C68 "0.1uF 16V" CAPC1005 5653.54,6023.62 r270 top
C69 "0.1uF 16V" CAPC1005 5937.01,5488.19 r0 bottom
C70 "0.1uF 16V" CAPC1005 5653.54,5708.66 r270 top
C71 "0.1uF 16V" CAPC1005 5637.8,5866.14 r270 top
C72 "0.1uF 16V" CAPC1005 6417.32,5488.19 r180 bottom
C73 "0.1uF 16V" CAPC1005 6173.23,5488.19 r0 bottom
C74 "0.1uF 16V" CAPC1005 6661.42,5708.66 r90 bottom
C75 "0.1uF 16V" CAPC1005 6661.42,6047.24 r270 top
C76 "0.1uF 16V" CAPC1005 6299.21,6346.46 r180 top
C77 "0.1uF 16V" CAPC1005 6007.88,6216.54 r180 bottom
C78 "10nF 16V" CAPC1005 5692.91,6023.62 r270 top
C79 "10nF 16V" CAPC1005 5937.01,5448.82 r0 bottom
C80 "10nF 16V" CAPC1005 5692.91,5708.66 r270 top
C81 "10nF 16V" CAPC1005 5677.17,5866.14 r270 top
C82 "10nF 16V" CAPC1005 6417.32,5448.82 r180 bottom
C83 "10nF 16V" CAPC1005 6173.23,5448.82 r0 bottom
C84 "10nF 16V" CAPC1005 6661.42,5724.41 r90 top
C85 "10nF 16V" CAPC1005 6661.42,6086.61 r90 bottom
C86 "10nF 16V" CAPC1005 6299.21,6307.09 r180 top
C87 "10nF 16V" CAPC1005 6007.88,6185.04 r180 bottom
C88 "10uF 16V" CAPC3528 5940.95,5732.28 r90 bottom
C89 "10uF 16V" CAPC3528 6244.1,6007.87 r90 bottom
C90 "0.1uF 16V" CAPC1005 6484.25,5610.24 r180 bottom
C91 "0.1uF 16V" CAPC1005 6318.9,5515.75 r90 bottom
C92 "0.1uF 16V" CAPC1005 5818.9,5500 r270 bottom
C93 "0.1uF 16V" CAPC1005 6677.17,5929.13 r90 top
C94 "0.1uF 16V" CAPC1005 6464.57,6370.08 r180 top
C95 "0.1uF 16V" CAPC1005 6141.73,6370.08 r180 top
C96 "10nF 16V" CAPC1005 6141.73,6330.71 r180 top
C97 "10nF 16V" CAPC1005 5779.53,5500 r270 bottom
C98 "10nF 16V" CAPC1005 6279.53,5515.75 r90 bottom
C99 "10nF 16V" CAPC1005 6484.25,5570.87 r180 bottom
C100 "10nF 16V" CAPC1005 6464.57,6330.71 r180 top
C101 "10nF 16V" CAPC1005 6637.8,5929.13 r90 top
C102 "10uF 16V" CAPC3528 5736.22,5192.91 r90 top
C103 "0.1uF 16V" CAPC1005 5566.93,5094.49 r0 top
C104 "10nF 16V" CAPC1005 5397.64,5125.98 r270 top
C105 "10nF 16V" CAPC1005 5358.27,5125.98 r270 top
C106 "10nF 16V" CAPC1005 5566.93,5133.86 r0 top
C107 "10nF 16V" CAPC1005 6444.88,5047.24 r180 top
C108 "10nF 16V" CAPC1005 6177.17,4862.21 r270 top
C109 "10nF 16V" CAPC1005 6027.56,5047.24 r180 top
C110 "10uF 16V" CAPC3528 5988.19,4799.21 r180 top
C111 "10uF 16V" CAPC3528 6417.32,4795.28 r0 top
C112 "0.1uF 16V" CAPC1005 6444.88,4968.5 r180 top
C113 "0.1uF 16V" CAPC1005 6602.36,5137.8 r270 top
C114 "10nF 16V" CAPC1005 6569.88,4851.39 r270 top
C115 "10nF 16V" CAPC1005 6444.88,4929.13 r0 top
C116 "10nF 16V" CAPC1005 6444.88,5007.87 r0 top
C117 "10nF 16V" CAPC1005 6444.88,4889.76 r180 top
C118 "0.1uF 16V" CAPC1005 6027.56,4968.5 r180 top
C119 "10nF 16V" CAPC1005 6027.56,4929.13 r0 top
C120 "10nF 16V" CAPC1005 6027.56,4889.76 r180 top
C121 "10nF 16V" CAPC1005 6027.56,5007.87 r0 top
C122 "0.1uF 16V" CAPC1005 6169.29,5240.16 r90 top
C123 "10uF 16V" CAPC3528 6181.1,6515.75 r90 top
C124 "220nF 10V" CAPC1608 5535.43,6905.51 r180 top
C125 "10uF 16V" CAPC3528 6224.41,4519.69 r90 top
C126 "220uF 4V" CAPC7343 6594.49,4511.81 r270 top
C127 "220uF 4V" CAPC7343 4417.32,6834.65 r90 top
C128 "220uF 4V" CAPC7343 4110.24,5862.21 r90 bottom
C129 "220uF 4V" CAPC7343 5421.26,5822.84 r0 bottom
C130 "220uF 4V" CAPC7343 4169.29,6834.65 r90 top
C131 "220uF 4V" CAPC7343 4771.65,6952.76 r180 top
C132 "220uF 4V" CAPC7343 6043.31,4519.69 r90 top
C133 "220uF 4V" CAPC7343 6594.49,6539.37 r90 top
D1 "200mA 30V" SOT95P230-3 6098.43,5771.65 r90 bottom
HDR1 "DOCKSTAT M HEADER" 54075 5358.27,6515.75 r0 bottom locked
HDR2 "DOCKSTAT M HEADER" 54075 5358.27,4515.75 r0 bottom locked
LED1 "RED" LED2013 5948.82,4216.54 r180 top locked
LED2 "GREEN" LED2013 4767.72,4216.54 r180 top locked
LED3 "RED" LED2013 6527.56,7259.84 r180 top
P1 "1x2 HEADER" HDR1X2 5125.99,7625.98 r270 top
P2 "2x10 IDC HEADER" IDC2.54-V20D 5992.13,7574.8 r180 top locked
R1 "4K7 5%" RESC1005 6224.41,6799.21 r270 bottom
R2 "100R 5%" RESC2012 5149.61,6212.6 r0 top
R3 "100R 5%" RESC2012 5543.31,6799.21 r90 bottom
R4 "100R 5%" RESC2012 5637.8,6799.21 r90 bottom
R5 "270R 1%" RESC2012 6185.04,4216.54 r180 top
R6 "100R 5%" RESC2012 5842.52,6515.75 r90 top
R7 "100R 5%" RESC2012 5137.8,6846.46 r180 bottom
R8 "100R 5%" RESC2012 4066.93,6251.97 r270 top
R9 "100R 5%" RESC2012 4090.55,5921.26 r270 top
R10 "100R 5%" RESC2012 4145.67,6251.97 r270 top
R11 "100R 5%" RESC2012 5720.47,6799.21 r90 bottom
R12 "100R 5%" RESC2012 5763.78,6515.75 r270 top
R13 "100R 5%" RESC2012 5685.04,6515.75 r270 top
R14 "100R 5%" RESC2012 5889.77,6799.21 r270 bottom
R15 "4K7 5%" RESC1005 5685.04,6791.34 r180 top
R16 "100R 5%" RESC2012 4500,4271.65 r180 top
R17 "4K7 5%" RESC1005 5118.11,6893.7 r0 top
R18 "4K7 5%" RESC1005 5685.04,6744.1 r180 top
R19 "4K7 5%" RESC1005 4972.44,4157.48 r0 top
R20 "4K7 5%" RESC1005 6240.16,5515.75 r270 bottom
R21 "4K7 5%" RESC1005 6582.68,5755.91 r180 bottom
R22 "4K7 5%" RESC1005 6582.68,5716.54 r180 bottom
R23 "4K7 5%" RESC1005 6582.68,5677.17 r180 bottom
R24 "4K7 5%" RESC1005 5685.04,6838.58 r0 top
R25 "4K7 5%" RESC1005 6582.68,6110.24 r180 bottom
R26 "4K7 5%" RESC1005 6582.68,6070.87 r180 bottom
R27 "4K7 5%" RESC1005 6582.68,6031.5 r180 bottom
R28 "4K7 5%" RESC1005 6582.68,5992.13 r180 bottom
R29 "4K7 5%" RESC1005 6244.1,5870.08 r0 bottom
R30 "4K7 5%" RESC1005 6393.7,5870.08 r0 bottom
R31 "4K7 5%" RESC1005 6582.68,5952.76 r180 bottom
R32 "4K7 5%" RESC1005 6582.68,5913.39 r180 bottom
R33 "4K7 5%" RESC1005 6582.68,5834.65 r180 bottom
R34 "4K7 5%" RESC1005 6582.68,5795.28 r180 bottom
R35 "4K7 5%" RESC1005 6582.68,5874.02 r180 bottom
R36 "4K7 5%" RESC1005 5968.51,5590.55 r0 bottom
R37 "270R 1%" RESC2012 6094.49,5649.61 r180 bottom
R38 "10M 5%" RESC2012 6665.36,5610.24 r90 top
R39 "4K7 5%" RESC1005 6582.68,6149.61 r180 bottom
R40 "4K7 5%" RESC1005 6582.68,6228.35 r0 bottom
R41 "4K7 5%" RESC1005 6511.81,6251.97 r270 bottom
R42 "4K7 5%" RESC1005 6472.44,6251.97 r270 bottom
R43 "4K7 5%" RESC1005 6433.07,6251.97 r270 bottom
R44 "4K7 5%" RESC1005 5968.51,5543.31 r0 bottom
R45 "4K7 5%" RESC1005 6393.7,6251.97 r270 bottom
R46 "270R 1%" RESC2012 6094.49,5559.06 r180 bottom
R47 "10M 5%" RESC2012 6665.36,5409.45 r90 top
R48 "4K7 5%" RESC1005 6582.68,6188.98 r180 bottom
R49 "4K7 5%" RESC1005 6582.68,6267.72 r0 bottom
R50 "4K7 5%" RESC1005 6314.96,6251.97 r270 bottom
R51 "4K7 5%" RESC1005 6354.33,6251.97 r270 bottom
R52 "4K7 5%" RESC1005 6236.22,6251.97 r270 bottom
R53 "4K7 5%" RESC1005 6275.59,6251.97 r270 bottom
R54 "4K7 5%" RESC1005 6153.54,6251.97 r270 bottom
R55 "4K7 5%" RESC1005 6114.17,6251.97 r270 bottom
R56 "4K7 5%" RESC1005 6074.8,6251.97 r90 bottom
R57 "4K7 5%" RESC1005 6106.3,6799.21 r270 bottom
R58 "270R 1%" RESC2012 5905.51,7011.81 r0 top
R59 "100R 5%" RESC2012 6098.43,5897.64 r0 bottom
R60 "4K7 5%" RESC1005 6145.67,6799.21 r90 bottom
R61 "4K7 5%" RESC1005 6275.59,6799.21 r270 bottom
R62 "4K7 5%" RESC1005 6224.41,7019.69 r90 bottom
R63 "4K7 5%" RESC1005 6299.21,7019.69 r270 bottom
R64 "270R 1%" RESC2012 5736.22,4200.79 r0 top
R65 "270R 1%" RESC2012 5736.22,4122.05 r180 top
R66 "4K7 5%" RESC1005 6098.43,7019.69 r270 bottom
R67 "4K7 5%" RESC1005 6051.18,7019.69 r270 bottom
TP1 "3V3" TestPin 4051.18,7240.16 r0 top
TP2 "1V8" TestPin 4051.18,7381.89 r90 top
TP3 "PROC_TDO" TestPin 5960.63,7291.34 r90 top
TP4 "PROC_TCK" TestPin 6314.96,7291.34 r90 top
TP5 "PROC_TMS" TestPin 6078.74,7291.34 r90 top
TP6 "PROC_TDI" TestPin 6196.85,7291.34 r90 top
TP7 "2V5" TestPin 4051.18,7311.02 r90 top
TP8 "5V0" TestPin 4051.18,7169.29 r90 top
TP9 "1V25" TestPin 4051.16,7452.75 r90 top
TP10 "GND" TestPin 4051.18,7523.62 r90 top
U1 "XC3S1000-4FG456C" BGA100P22X22-456 4736.22,5421.26 r0 top locked
U2 "SN74LVC1G04DBV" SOT95P280-5 4122.05,4204.72 r0 top
U3 "SRAM-256Kx16" TSOP80P1176-44 5251.97,6590.55 r0 top locked
U4 "SRAM-256Kx16" TSOP80P1176-44 5251.97,4440.95 r0 top locked
U5 "LH79520N0M000" QFP40P2000X2000-176 6165.36,5834.65 r0 top locked
U6 "74LCX157" TSOP65P638-16 6236.22,6909.45 r0 top locked
U7 "SDRAM-16Mx16" BGA80P9X6-54 6027.56,5047.24 r270 bottom locked
U8 "FLASH-4Mx16" BGA80P12X8-63 5519.69,5220.47 r90 bottom locked
U9 "SDRAM-16Mx16" BGA80P9X6-54 6444.88,5047.24 r270 bottom locked
U10 "VRG-100mA-1.2V-37V-4%-75102" SOP127P600-8 5732.28,4141.73 r270 bottom locked
U11 "LM1084IS-ADJ" TO254P1435-4 5610.24,7240.16 r270 bottom

## Footprints (in the part's own frame and the unit in brackets; to place one, negate y for a bottom-side part, rotate by r counter-clockwise, add the part's x,y. Pads: shape width x height; smd on the part's side, far side on the other; paste and mask are expansions set on the pad)
54075 [mm] "Connector; Docking Station, Receptacle; 100 Position; Vertical"
  rect 0.5x1.9 smd: 1(-19.6,3.4) 2(-19.6,-3.4) 3(-18.8,3.4) 4(-18.8,-3.4) 5(-18,3.4) 6(-18,-3.4) 7(-17.2,3.4) 8(-17.2,-3.4) 9(-16.4,3.4) 10(-16.4,-3.4) 11(-15.6,3.4) 12(-15.6,-3.4) 13(-14.8,3.4) 14(-14.8,-3.4) 15(-14,3.4) 16(-14,-3.4) 17(-13.2,3.4) 18(-13.2,-3.4) 19(-12.4,3.4) 20(-12.4,-3.4) 21(-11.6,3.4) 22(-11.6,-3.4) 23(-10.8,3.4) 24(-10.8,-3.4) 25(-10,3.4) 26(-10,-3.4) 27(-9.2,3.4) 28(-9.2,-3.4) 29(-8.4,3.4) 30(-8.4,-3.4) 31(-7.6,3.4) 32(-7.6,-3.4) 33(-6.8,3.4) 34(-6.8,-3.4) 35(-6,3.4) 36(-6,-3.4) 37(-5.2,3.4) 38(-5.2,-3.4) 39(-4.4,3.4) 40(-4.4,-3.4) 41(-3.6,3.4) 42(-3.6,-3.4) 43(-2.8,3.4) 44(-2.8,-3.4) 45(-2,3.4) 46(-2,-3.4) 47(-1.2,3.4) 48(-1.2,-3.4) 49(-0.4,3.4) 50(-0.4,-3.4) 51(0.4,3.4) 52(0.4,-3.4) 53(1.2,3.4) 54(1.2,-3.4) 55(2,3.4) 56(2,-3.4) 57(2.8,3.4) 58(2.8,-3.4) 59(3.6,3.4) 60(3.6,-3.4) 61(4.4,3.4) 62(4.4,-3.4) 63(5.2,3.4) 64(5.2,-3.4) 65(6,3.4) 66(6,-3.4) 67(6.8,3.4) 68(6.8,-3.4) 69(7.6,3.4) 70(7.6,-3.4) 71(8.4,3.4) 72(8.4,-3.4) 73(9.2,3.4) 74(9.2,-3.4) 75(10,3.4) 76(10,-3.4) 77(10.8,3.4) 78(10.8,-3.4) 79(11.6,3.4) 80(11.6,-3.4) 81(12.4,3.4) 82(12.4,-3.4) 83(13.2,3.4) 84(13.2,-3.4) 85(14,3.4) 86(14,-3.4) 87(14.8,3.4) 88(14.8,-3.4) 89(15.6,3.4) 90(15.6,-3.4) 91(16.4,3.4) 92(16.4,-3.4) 93(17.2,3.4) 94(17.2,-3.4) 95(18,3.4) 96(18,-3.4) 97(18.8,3.4) 98(18.8,-3.4) 99(19.6,3.4) 100(19.6,-3.4)
  round 0.5 hole 0.7 unplated: MH1(-26.7,4.2) MH2(-25.9,-4.2) MH3(26.7,4.2) MH4(25.9,-4.2)
  round 4.8 hole 5.1 unplated: MH5(-26.3,0) MH6(26.3,0)
  Top Layer keep-out region: -20.15,2.15 20.15,2.15 20.15,-2.15 -20.15,-2.15
  silkscreen extent -30.35,-4.4 30.35,5.02
BGA80P9X6-54 [mm] "BGA; 54 Balls; Body 8 x 14 mm; Pitch 0.8 mm (FG Package)"
  round 0.35 smd: A1(3.2,3.2) A2(3.2,2.4) A3(3.2,1.6) A7(3.2,-1.6) A8(3.2,-2.4) A9(3.2,-3.2) B1(2.4,3.2) B2(2.4,2.4) B3(2.4,1.6) B7(2.4,-1.6) B8(2.4,-2.4) B9(2.4,-3.2) C1(1.6,3.2) C2(1.6,2.4) C3(1.6,1.6) C7(1.6,-1.6) C8(1.6,-2.4) C9(1.6,-3.2) D1(0.8,3.2) D2(0.8,2.4) D3(0.8,1.6) D7(0.8,-1.6) D8(0.8,-2.4) D9(0.8,-3.2) E1(0,3.2) E2(0,2.4) E3(0,1.6) E7(0,-1.6) E8(0,-2.4) E9(0,-3.2) F1(-0.8,3.2) F2(-0.8,2.4) F3(-0.8,1.6) F7(-0.8,-1.6) F8(-0.8,-2.4) F9(-0.8,-3.2) G1(-1.6,3.2) G2(-1.6,2.4) G3(-1.6,1.6) G7(-1.6,-1.6) G8(-1.6,-2.4) G9(-1.6,-3.2) H1(-2.4,3.2) H2(-2.4,2.4) H3(-2.4,1.6) H7(-2.4,-1.6) H8(-2.4,-2.4) H9(-2.4,-3.2) J1(-3.2,3.2) J2(-3.2,2.4) J3(-3.2,1.6) J7(-3.2,-1.6) J8(-3.2,-2.4) J9(-3.2,-3.2)
  silkscreen extent -7,-4 7,4.78
BGA80P12X8-63 [mm] "BGA; 63 Balls; Body 12 x 11 mm; Pitch 0.8 mm"
  round 0.3 smd: A1(4.4,2.8) A2(4.4,2) A7(4.4,-2) A8(4.4,-2.8) B1(3.6,2.8) B7(3.6,-2) B8(3.6,-2.8) C2(2.8,2) C3(2.8,1.2) C4(2.8,0.4) C5(2.8,-0.4) C6(2.8,-1.2) C7(2.8,-2) D2(2,2) D3(2,1.2) D4(2,0.4) D5(2,-0.4) D6(2,-1.2) D7(2,-2) E2(1.2,2) E3(1.2,1.2) E4(1.2,0.4) E5(1.2,-0.4) E6(1.2,-1.2) E7(1.2,-2) F2(0.4,2) F3(0.4,1.2) F4(0.4,0.4) F5(0.4,-0.4) F6(0.4,-1.2) F7(0.4,-2) G2(-0.4,2) G3(-0.4,1.2) G4(-0.4,0.4) G5(-0.4,-0.4) G6(-0.4,-1.2) G7(-0.4,-2) H2(-1.2,2) H3(-1.2,1.2) H4(-1.2,0.4) H5(-1.2,-0.4) H6(-1.2,-1.2) H7(-1.2,-2) J2(-2,2) J3(-2,1.2) J4(-2,0.4) J5(-2,-0.4) J6(-2,-1.2) J7(-2,-2) K2(-2.8,2) K3(-2.8,1.2) K4(-2.8,0.4) K5(-2.8,-0.4) K6(-2.8,-1.2) K7(-2.8,-2) L1(-3.6,2.8) L2(-3.6,2) L7(-3.6,-2) L8(-3.6,-2.8) M1(-4.4,2.8) M2(-4.4,2) M7(-4.4,-2) M8(-4.4,-2.8)
  silkscreen extent -6,-5.5 6,6.28
BGA100P22X22-456 [mm] "456-Ball Fine-Pitch Ball Grid Array (FG456)"
  round 0.5 smd: A1(-10.5,10.5) A2(-9.5,10.5) A3(-8.5,10.5) A4(-7.5,10.5) A5(-6.5,10.5) A6(-5.5,10.5) A7(-4.5,10.5) A8(-3.5,10.5) A9(-2.5,10.5) A10(-1.5,10.5) A11(-0.5,10.5) A12(0.5,10.5) A13(1.5,10.5) A14(2.5,10.5) A15(3.5,10.5) A16(4.5,10.5) A17(5.5,10.5) A18(6.5,10.5) A19(7.5,10.5) A20(8.5,10.5) A21(9.5,10.5) A22(10.5,10.5) AA1(-10.5,-9.5) AA2(-9.5,-9.5) AA3(-8.5,-9.5) AA4(-7.5,-9.5) AA5(-6.5,-9.5) AA6(-5.5,-9.5) AA7(-4.5,-9.5) AA8(-3.5,-9.5) AA9(-2.5,-9.5) AA10(-1.5,-9.5) AA11(-0.5,-9.5) AA12(0.5,-9.5) AA13(1.5,-9.5) AA14(2.5,-9.5) AA15(3.5,-9.5) AA16(4.5,-9.5) AA17(5.5,-9.5) AA18(6.5,-9.5) AA19(7.5,-9.5) AA20(8.5,-9.5) AA21(9.5,-9.5) AA22(10.5,-9.5) AB1(-10.5,-10.5) AB2(-9.5,-10.5) AB3(-8.5,-10.5) AB4(-7.5,-10.5) AB5(-6.5,-10.5) AB6(-5.5,-10.5) AB7(-4.5,-10.5) AB8(-3.5,-10.5) AB9(-2.5,-10.5) AB10(-1.5,-10.5) AB11(-0.5,-10.5) AB12(0.5,-10.5) AB13(1.5,-10.5) AB14(2.5,-10.5) AB15(3.5,-10.5) AB16(4.5,-10.5) AB17(5.5,-10.5) AB18(6.5,-10.5) AB19(7.5,-10.5) AB20(8.5,-10.5) AB21(9.5,-10.5) AB22(10.5,-10.5) B1(-10.5,9.5) B2(-9.5,9.5) B3(-8.5,9.5) B4(-7.5,9.5) B5(-6.5,9.5) B6(-5.5,9.5) B7(-4.5,9.5) B8(-3.5,9.5) B9(-2.5,9.5) B10(-1.5,9.5) B11(-0.5,9.5) B12(0.5,9.5) B13(1.5,9.5) B14(2.5,9.5) B15(3.5,9.5) B16(4.5,9.5) B17(5.5,9.5) B18(6.5,9.5) B19(7.5,9.5) B20(8.5,9.5) B21(9.5,9.5) B22(10.5,9.5) C1(-10.5,8.5) C2(-9.5,8.5) C3(-8.5,8.5) C4(-7.5,8.5) C5(-6.5,8.5) C6(-5.5,8.5) C7(-4.5,8.5) C8(-3.5,8.5) C9(-2.5,8.5) C10(-1.5,8.5) C11(-0.5,8.5) C12(0.5,8.5) C13(1.5,8.5) C14(2.5,8.5) C15(3.5,8.5) C16(4.5,8.5) C17(5.5,8.5) C18(6.5,8.5) C19(7.5,8.5) C20(8.5,8.5) C21(9.5,8.5) C22(10.5,8.5) D1(-10.5,7.5) D2(-9.5,7.5) D3(-8.5,7.5) D4(-7.5,7.5) D5(-6.5,7.5) D6(-5.5,7.5) D7(-4.5,7.5) D8(-3.5,7.5) D9(-2.5,7.5) D10(-1.5,7.5) D11(-0.5,7.5) D12(0.5,7.5) D13(1.5,7.5) D14(2.5,7.5) D15(3.5,7.5) D16(4.5,7.5) D17(5.5,7.5) D18(6.5,7.5) D19(7.5,7.5) D20(8.5,7.5) D21(9.5,7.5) D22(10.5,7.5) E1(-10.5,6.5) E2(-9.5,6.5) E3(-8.5,6.5) E4(-7.5,6.5) E5(-6.5,6.5) E6(-5.5,6.5) E7(-4.5,6.5) E8(-3.5,6.5) E9(-2.5,6.5) E10(-1.5,6.5) E11(-0.5,6.5) E12(0.5,6.5) E13(1.5,6.5) E14(2.5,6.5) E15(3.5,6.5) E16(4.5,6.5) E17(5.5,6.5) E18(6.5,6.5) E19(7.5,6.5) E20(8.5,6.5) E21(9.5,6.5) E22(10.5,6.5) F1(-10.5,5.5) F2(-9.5,5.5) F3(-8.5,5.5) F4(-7.5,5.5) F5(-6.5,5.5) F6(-5.5,5.5) F7(-4.5,5.5) F8(-3.5,5.5) F9(-2.5,5.5) F10(-1.5,5.5) F11(-0.5,5.5) F12(0.5,5.5) F13(1.5,5.5) F14(2.5,5.5) F15(3.5,5.5) F16(4.5,5.5) F17(5.5,5.5) F18(6.5,5.5) F19(7.5,5.5) F20(8.5,5.5) F21(9.5,5.5) F22(10.5,5.5) G1(-10.5,4.5) G2(-9.5,4.5) G3(-8.5,4.5) G4(-7.5,4.5) G5(-6.5,4.5) G6(-5.5,4.5) G7(-4.5,4.5) G8(-3.5,4.5) G9(-2.5,4.5) G10(-1.5,4.5) G11(-0.5,4.5) G12(0.5,4.5) G13(1.5,4.5) G14(2.5,4.5) G15(3.5,4.5) G16(4.5,4.5) G17(5.5,4.5) G18(6.5,4.5) G19(7.5,4.5) G20(8.5,4.5) G21(9.5,4.5) G22(10.5,4.5) H1(-10.5,3.5) H2(-9.5,3.5) H3(-8.5,3.5) H4(-7.5,3.5) H5(-6.5,3.5) H6(-5.5,3.5) H7(-4.5,3.5) H16(4.5,3.5) H17(5.5,3.5) H18(6.5,3.5) H19(7.5,3.5) H20(8.5,3.5) H21(9.5,3.5) H22(10.5,3.5) J1(-10.5,2.5) J2(-9.5,2.5) J3(-8.5,2.5) J4(-7.5,2.5) J5(-6.5,2.5) J6(-5.5,2.5) J7(-4.5,2.5) J9(-2.5,2.5) J10(-1.5,2.5) J11(-0.5,2.5) J12(0.5,2.5) J13(1.5,2.5) J14(2.5,2.5) J16(4.5,2.5) J17(5.5,2.5) J18(6.5,2.5) J19(7.5,2.5) J20(8.5,2.5) J21(9.5,2.5) J22(10.5,2.5) K1(-10.5,1.5) K2(-9.5,1.5) K3(-8.5,1.5) K4(-7.5,1.5) K5(-6.5,1.5) K6(-5.5,1.5) K7(-4.5,1.5) K9(-2.5,1.5) K10(-1.5,1.5) K11(-0.5,1.5) K12(0.5,1.5) K13(1.5,1.5) K14(2.5,1.5) K16(4.5,1.5) K17(5.5,1.5) K18(6.5,1.5) K19(7.5,1.5) K20(8.5,1.5) K21(9.5,1.5) K22(10.5,1.5) L1(-10.5,0.5) L2(-9.5,0.5) L3(-8.5,0.5) L4(-7.5,0.5) L5(-6.5,0.5) L6(-5.5,0.5) L7(-4.5,0.5) L9(-2.5,0.5) L10(-1.5,0.5) L11(-0.5,0.5) L12(0.5,0.5) L13(1.5,0.5) L14(2.5,0.5) L16(4.5,0.5) L17(5.5,0.5) L18(6.5,0.5) L19(7.5,0.5) L20(8.5,0.5) L21(9.5,0.5) L22(10.5,0.5) M1(-10.5,-0.5) M2(-9.5,-0.5) M3(-8.5,-0.5) M4(-7.5,-0.5) M5(-6.5,-0.5) M6(-5.5,-0.5) M7(-4.5,-0.5) M9(-2.5,-0.5) M10(-1.5,-0.5) M11(-0.5,-0.5) M12(0.5,-0.5) M13(1.5,-0.5) M14(2.5,-0.5) M16(4.5,-0.5) M17(5.5,-0.5) M18(6.5,-0.5) M19(7.5,-0.5) M20(8.5,-0.5) M21(9.5,-0.5) M22(10.5,-0.5) N1(-10.5,-1.5) N2(-9.5,-1.5) N3(-8.5,-1.5) N4(-7.5,-1.5) N5(-6.5,-1.5) N6(-5.5,-1.5) N7(-4.5,-1.5) N9(-2.5,-1.5) N10(-1.5,-1.5) N11(-0.5,-1.5) N12(0.5,-1.5) N13(1.5,-1.5) N14(2.5,-1.5) N16(4.5,-1.5) N17(5.5,-1.5) N18(6.5,-1.5) N19(7.5,-1.5) N20(8.5,-1.5) N21(9.5,-1.5) N22(10.5,-1.5) P1(-10.5,-2.5) P2(-9.5,-2.5) P3(-8.5,-2.5) P4(-7.5,-2.5) P5(-6.5,-2.5) P6(-5.5,-2.5) P7(-4.5,-2.5) P9(-2.5,-2.5) P10(-1.5,-2.5) P11(-0.5,-2.5) P12(0.5,-2.5) P13(1.5,-2.5) P14(2.5,-2.5) P16(4.5,-2.5) P17(5.5,-2.5) P18(6.5,-2.5) P19(7.5,-2.5) P20(8.5,-2.5) P21(9.5,-2.5) P22(10.5,-2.5) R1(-10.5,-3.5) R2(-9.5,-3.5) R3(-8.5,-3.5) R4(-7.5,-3.5) R5(-6.5,-3.5) R6(-5.5,-3.5) R7(-4.5,-3.5) R16(4.5,-3.5) R17(5.5,-3.5) R18(6.5,-3.5) R19(7.5,-3.5) R20(8.5,-3.5) R21(9.5,-3.5) R22(10.5,-3.5) T1(-10.5,-4.5) T2(-9.5,-4.5) T3(-8.5,-4.5) T4(-7.5,-4.5) T5(-6.5,-4.5) T6(-5.5,-4.5) T7(-4.5,-4.5) T8(-3.5,-4.5) T9(-2.5,-4.5) T10(-1.5,-4.5) T11(-0.5,-4.5) T12(0.5,-4.5) T13(1.5,-4.5) T14(2.5,-4.5) T15(3.5,-4.5) T16(4.5,-4.5) T17(5.5,-4.5) T18(6.5,-4.5) T19(7.5,-4.5) T20(8.5,-4.5) T21(9.5,-4.5) T22(10.5,-4.5) U1(-10.5,-5.5) U2(-9.5,-5.5) U3(-8.5,-5.5) U4(-7.5,-5.5) U5(-6.5,-5.5) U6(-5.5,-5.5) U7(-4.5,-5.5) U8(-3.5,-5.5) U9(-2.5,-5.5) U10(-1.5,-5.5) U11(-0.5,-5.5) U12(0.5,-5.5) U13(1.5,-5.5) U14(2.5,-5.5) U15(3.5,-5.5) U16(4.5,-5.5) U17(5.5,-5.5) U18(6.5,-5.5) U19(7.5,-5.5) U20(8.5,-5.5) U21(9.5,-5.5) U22(10.5,-5.5) V1(-10.5,-6.5) V2(-9.5,-6.5) V3(-8.5,-6.5) V4(-7.5,-6.5) V5(-6.5,-6.5) V6(-5.5,-6.5) V7(-4.5,-6.5) V8(-3.5,-6.5) V9(-2.5,-6.5) V10(-1.5,-6.5) V11(-0.5,-6.5) V12(0.5,-6.5) V13(1.5,-6.5) V14(2.5,-6.5) V15(3.5,-6.5) V16(4.5,-6.5) V17(5.5,-6.5) V18(6.5,-6.5) V19(7.5,-6.5) V20(8.5,-6.5) V21(9.5,-6.5) V22(10.5,-6.5) W1(-10.5,-7.5) W2(-9.5,-7.5) W3(-8.5,-7.5) W4(-7.5,-7.5) W5(-6.5,-7.5) W6(-5.5,-7.5) W7(-4.5,-7.5) W8(-3.5,-7.5) W9(-2.5,-7.5) W10(-1.5,-7.5) W11(-0.5,-7.5) W12(0.5,-7.5) W13(1.5,-7.5) W14(2.5,-7.5) W15(3.5,-7.5) W16(4.5,-7.5) W17(5.5,-7.5) W18(6.5,-7.5) W19(7.5,-7.5) W20(8.5,-7.5) W21(9.5,-7.5) W22(10.5,-7.5) Y1(-10.5,-8.5) Y2(-9.5,-8.5) Y3(-8.5,-8.5) Y4(-7.5,-8.5) Y5(-6.5,-8.5) Y6(-5.5,-8.5) Y7(-4.5,-8.5) Y8(-3.5,-8.5) Y9(-2.5,-8.5) Y10(-1.5,-8.5) Y11(-0.5,-8.5) Y12(0.5,-8.5) Y13(1.5,-8.5) Y14(2.5,-8.5) Y15(3.5,-8.5) Y16(4.5,-8.5) Y17(5.5,-8.5) Y18(6.5,-8.5) Y19(7.5,-8.5) Y20(8.5,-8.5) Y21(9.5,-8.5) Y22(10.5,-8.5)
  silkscreen extent -12.27,-11.5 11.5,11.5
CAPC1005 [mm]
  rect 0.6x0.5 smd: 1(-0.5,0) 2(0.5,0)
  silkscreen extent -0.1,-0.2 0.1,0.2
CAPC1608 [mm]
  rect 1.1x1 smd: 1(-0.85,0) 2(0.85,0)
  silkscreen extent -1.7,-0.4 -1.7,0.4
CAPC3528 [mm]
  rect 2x2.2 smd: 1(-1.5,0) 2(1.5,0)
  silkscreen extent -2.3,-1.6 1.8,1.6
CAPC7343 [mm]
  rect 2.6x2.4 smd: 1(-3.202,0.007) 2(3.198,0.007)
  silkscreen extent -4.2,-2.39 3.7,2.41
HDR1X2 [mm] "Connector; Header; 2 Position"
  rect 1.5x1.5 hole 0.889: 1(0,0)
  round 1.5 hole 0.889: 2(2.54,0)
  silkscreen extent -1.27,-1.27 3.81,1.27
IDC2.54-V20D [mm]
  rect 1.65x1.65 hole 0.889: 1(-11.43,-1.27)
  round 1.65 hole 0.889: 2(-11.43,1.27) 3(-8.89,-1.27) 4(-8.89,1.27) 5(-6.35,-1.27) 6(-6.35,1.27) 7(-3.81,-1.27) 8(-3.81,1.27) 9(-1.27,-1.27) 10(-1.27,1.27) 11(1.27,-1.27) 12(1.27,1.27) 13(3.81,-1.27) 14(3.81,1.27) 15(6.35,-1.27) 16(6.35,1.27) 17(8.89,-1.27) 18(8.89,1.27) 19(11.43,-1.27) 20(11.43,1.27)
  silkscreen extent -16.51,-5.37 16.51,4.6
LED2013 [mm]
  rect 1.3x1.6 smd: 1(0.95,0) 2(-0.95,0)
  silkscreen extent -2.13,-1.15 2,1.15
QFP40P2000X2000-176 [mm] "QFP; 176 Leads; Body 20 x 20 mm; Pitch 0.4 mm"
  rect 1.6x0.25 smd: 1(-10.6,8.6) 2(-10.6,8.2) 3(-10.6,7.8) 4(-10.6,7.4) 5(-10.6,7) 6(-10.6,6.6) 7(-10.6,6.2) 8(-10.6,5.8) 9(-10.6,5.4) 10(-10.6,5) 11(-10.6,4.6) 12(-10.6,4.2) 13(-10.6,3.8) 14(-10.6,3.4) 15(-10.6,3) 16(-10.6,2.6) 17(-10.6,2.2) 18(-10.6,1.8) 19(-10.6,1.4) 20(-10.6,1) 21(-10.6,0.6) 22(-10.6,0.2) 23(-10.6,-0.2) 24(-10.6,-0.6) 25(-10.6,-1) 26(-10.6,-1.4) 27(-10.6,-1.8) 28(-10.6,-2.2) 29(-10.6,-2.6) 30(-10.6,-3) 31(-10.6,-3.4) 32(-10.6,-3.8) 33(-10.6,-4.2) 34(-10.6,-4.6) 35(-10.6,-5) 36(-10.6,-5.4) 37(-10.6,-5.8) 38(-10.6,-6.2) 39(-10.6,-6.6) 40(-10.6,-7) 41(-10.6,-7.4) 42(-10.6,-7.8) 43(-10.6,-8.2) 44(-10.6,-8.6) 89(10.6,-8.6) 90(10.6,-8.2) 91(10.6,-7.8) 92(10.6,-7.4) 93(10.6,-7) 94(10.6,-6.6) 95(10.6,-6.2) 96(10.6,-5.8) 97(10.6,-5.4) 98(10.6,-5) 99(10.6,-4.6) 100(10.6,-4.2) 101(10.6,-3.8) 102(10.6,-3.4) 103(10.6,-3) 104(10.6,-2.6) 105(10.6,-2.2) 106(10.6,-1.8) 107(10.6,-1.4) 108(10.6,-1) 109(10.6,-0.6) 110(10.6,-0.2) 111(10.6,0.2) 112(10.6,0.6) 113(10.6,1) 114(10.6,1.4) 115(10.6,1.8) 116(10.6,2.2) 117(10.6,2.6) 118(10.6,3) 119(10.6,3.4) 120(10.6,3.8) 121(10.6,4.2) 122(10.6,4.6) 123(10.6,5) 124(10.6,5.4) 125(10.6,5.8) 126(10.6,6.2) 127(10.6,6.6) 128(10.6,7) 129(10.6,7.4) 130(10.6,7.8) 131(10.6,8.2) 132(10.6,8.6)
  rect 0.25x1.6 smd: 45(-8.6,-10.6) 46(-8.2,-10.6) 47(-7.8,-10.6) 48(-7.4,-10.6) 49(-7,-10.6) 50(-6.6,-10.6) 51(-6.2,-10.6) 52(-5.8,-10.6) 53(-5.4,-10.6) 54(-5,-10.6) 55(-4.6,-10.6) 56(-4.2,-10.6) 57(-3.8,-10.6) 58(-3.4,-10.6) 59(-3,-10.6) 60(-2.6,-10.6) 61(-2.2,-10.6) 62(-1.8,-10.6) 63(-1.4,-10.6) 64(-1,-10.6) 65(-0.6,-10.6) 66(-0.2,-10.6) 67(0.2,-10.6) 68(0.6,-10.6) 69(1,-10.6) 70(1.4,-10.6) 71(1.8,-10.6) 72(2.2,-10.6) 73(2.6,-10.6) 74(3,-10.6) 75(3.4,-10.6) 76(3.8,-10.6) 77(4.2,-10.6) 78(4.6,-10.6) 79(5,-10.6) 80(5.4,-10.6) 81(5.8,-10.6) 82(6.2,-10.6) 83(6.6,-10.6) 84(7,-10.6) 85(7.4,-10.6) 86(7.8,-10.6) 87(8.2,-10.6) 88(8.6,-10.6) 133(8.6,10.6) 134(8.2,10.6) 135(7.8,10.6) 136(7.4,10.6) 137(7,10.6) 138(6.6,10.6) 139(6.2,10.6) 140(5.8,10.6) 141(5.4,10.6) 142(5,10.6) 143(4.6,10.6) 144(4.2,10.6) 145(3.8,10.6) 146(3.4,10.6) 147(3,10.6) 148(2.6,10.6) 149(2.2,10.6) 150(1.8,10.6) 151(1.4,10.6) 152(1,10.6) 153(0.6,10.6) 154(0.2,10.6) 155(-0.2,10.6) 156(-0.6,10.6) 157(-1,10.6) 158(-1.4,10.6) 159(-1.8,10.6) 160(-2.2,10.6) 161(-2.6,10.6) 162(-3,10.6) 163(-3.4,10.6) 164(-3.8,10.6) 165(-4.2,10.6) 166(-4.6,10.6) 167(-5,10.6) 168(-5.4,10.6) 169(-5.8,10.6) 170(-6.2,10.6) 171(-6.6,10.6) 172(-7,10.6) 173(-7.4,10.6) 174(-7.8,10.6) 175(-8.2,10.6) 176(-8.6,10.6)
  silkscreen extent -12.07,-9.4 9.4,9.4
RESC1005 [mm]
  rect 0.6x0.5 smd: 1(0.5,0) 2(-0.5,0)
  silkscreen extent -0.1,-0.2 0.1,0.2
RESC2012 [mm]
  rect 1.3x1.5 smd: 1(-0.95,0) 2(0.95,0)
SOP127P600-8 [mm]
  rect 0.6x2.2 smd: 1(-1.905,-2.6) 2(-0.635,-2.6) 3(0.635,-2.6) 4(1.905,-2.6) 5(1.905,2.6) 6(0.635,2.6) 7(-0.635,2.6) 8(-1.905,2.6)
  silkscreen extent -2.88,-2.72 2.5,1.1
SOT95P230-3 [mm]
  rect 0.9x0.95 smd: 1(-0.95,-1.25) 2(0.95,-1.25) 3(0,1.25)
  silkscreen extent -2.07,-1.37 1.3,1.25
SOT95P280-5 [mm] "SOT-23/SC-74A; 5 Leads; Body 3.1 x 3 mm, inc. leads (LxW max)"
  rect 0.55x1.45 smd: 1(-0.95,-1.075) 2(0,-1.075) 3(0.95,-1.075) 4(0.95,1.075) 5(-0.95,1.075)
  silkscreen extent -1.57,-1.35 1.55,0.9
TestPin [mil] "SingleTest Pin"
  round 60 hole 35: 1(0,0)
TO254P1435-4 [mm]
  rect 1x3.4 smd: 1(0,0) 2(2.54,0) 3(5.08,0)
  rect 10.25x8.9 smd: 4(2.54,10.45)
  silkscreen extent -3.1,-0.13 8.2,14.8
TSOP65P638-16 [mm]
  rect 0.3x1.65 smd: 1(-2.275,-2.775) 2(-1.625,-2.775) 3(-0.975,-2.775) 4(-0.325,-2.775) 5(0.325,-2.775) 6(0.975,-2.775) 7(1.625,-2.775) 8(2.275,-2.775) 9(2.275,2.775) 10(1.625,2.775) 11(0.975,2.775) 12(0.325,2.775) 13(-0.325,2.775) 14(-0.975,2.775) 15(-1.625,2.775) 16(-2.275,2.775)
  silkscreen extent -3.1,-2.9 2.55,1.55
TSOP80P1176-44 [mm]
  rect 0.45x1.4 smd: 1(-8.4,-5.7) 2(-7.6,-5.7) 3(-6.8,-5.7) 4(-6,-5.7) 5(-5.2,-5.7) 6(-4.4,-5.7) 7(-3.6,-5.7) 8(-2.8,-5.7) 9(-2,-5.7) 10(-1.2,-5.7) 11(-0.4,-5.7) 12(0.4,-5.7) 13(1.2,-5.7) 14(2,-5.7) 15(2.8,-5.7) 16(3.6,-5.7) 17(4.4,-5.7) 18(5.2,-5.7) 19(6,-5.7) 20(6.8,-5.7) 21(7.6,-5.7) 22(8.4,-5.7) 23(8.4,5.7) 24(7.6,5.7) 25(6.8,5.7) 26(6,5.7) 27(5.2,5.7) 28(4.4,5.7) 29(3.6,5.7) 30(2.8,5.7) 31(2,5.7) 32(1.2,5.7) 33(0.4,5.7) 34(-0.4,5.7) 35(-1.2,5.7) 36(-2,5.7) 37(-2.8,5.7) 38(-3.6,5.7) 39(-4.4,5.7) 40(-5.2,5.7) 41(-6,5.7) 42(-6.8,5.7) 43(-7.6,5.7) 44(-8.4,5.7)
  silkscreen extent -9.29,-5.7 9.26,4.45

## Part data
C1 C4 C5 C6 C7 C8 C9 C10 C11 C12 C13 C14 C15 C18 C19 C20 C21 C22 C23 C24 C25 C26 C27 C28 C29 C33 C34 C35 C36 C37 C38 C39 C40 C41 C42 C43 C44 C45 C46 C47 C48 C51 C52 C53 C54 C55 C56 C57 C58 C59 C60 C61 C62 C63 C68 C69 C70 C71 C72 C73 C74 C75 C76 C77 C78 C79 C80 C81 C82 C83 C84 C85 C86 C87 C90 C91 C92 C93 C94 C95 C96 C97 C98 C99 C100 C101 C103 C104 C105 C106 C107 C108 C109 C112 C113 C114 C115 C116 C117 C118 C119 C120 C121 C122 C124: library part CAP, "Capacitor"
C2 C3 C16 C17 C30 C31 C32 C49 C50 C64 C65 C66 C67 C88 C89 C102 C110 C111 C123 C125 C126 C127 C128 C129 C130 C131 C132 C133: library part CAP_POLAR, "Polar Capacitor"
D1: library part BAT54, "Schottky Barrier Diode"
HDR1: library part 54075-1009-HD1, "Board-to-Board, Docking Station, 0.80mm (.031\") Pitch, Shielded Receptacle, Vertical, Ultra Low Profile, SMT"
HDR2: library part 54075-1009-HD2, "Board-to-Board, Docking Station, 0.80mm (.031\") Pitch, Shielded Receptacle, Vertical, Ultra Low Profile, SMT"
LED1 LED3: library part HSMX-C670, "Typical RED GaAs SMD LED Agilent make"
LED2: library part HSMX-C670, "Typical GREEN SMD LED Agilent make"
P1: library part "Header 2", "Header, 2-Pin"
P2: library part "Header 10X2", "Header, 10-Pin, Dual row"
R1 R2 R3 R4 R5 R6 R7 R8 R9 R10 R11 R12 R13 R14 R15 R16 R17 R18 R19 R20 R21 R22 R23 R24 R25 R26 R27 R28 R29 R30 R31 R32 R33 R34 R35 R36 R37 R38 R39 R40 R41 R42 R43 R44 R45 R46 R47 R48 R49 R50 R51 R52 R53 R54 R55 R56 R57 R58 R59 R60 R61 R62 R63 R64 R65 R66 R67: library part RES, "Resistor"
TP1 TP2 TP3 TP4 TP5 TP6 TP7 TP8 TP9 TP10: library part TestPin
U1: "Spartan-3 1.2V FPGA, 333 User I/Os, 456-ball FBGA, Standard Performance, Commercial Grade"
U2: library part SN74AHC1G04DBVR
U3 U4: library part "SRAM 256KX16 TSOP44", "256Kx16Bit SRAM TSOP44"
U5: "32-Bit ARM720T-Based BlueStreak MCU with 8KB Cache, MMU, Color LCD controller, 32KB SRAM, 176-Pin LQFP"
U6: library part 74AC157SJ, "Quad 2-Input Multiplexer"
U7 U9: library part MT48LC16M16A2FG-75, "256Mb Synchronous High-Speed CMOS DRAM, 16Mb x 16Bit x 4 Banks, 54-Ball FPGA, Commercial"
U8: library part AM29LV640DU90RWHI, "64 Mb (4 M x 16) CMOS 3.0 Volt, Uniform Sector Flash Memory with VersatileI/O Control, 63-ball FBGA, Industrial Grade"
U10: library part LM317LD, "Low Current 3-Terminal Adjustable Positive Voltage Regulator"
U11: "5A Low Dropout Possitive Regulators"

## Free pads (board coordinates)
  round 39.37 smd paste-39.37 mask+78.74: FID(4121.01,7648.97) FID(6388.73,4121.41)
  round 39.37 smd far side paste-39.37 mask+78.74: FID(4121.01,7648.97) FID(6388.73,4121.41)
  round 125.98 hole 137.8 unplated: LP(4157.48,5338.58) LP(6559.06,4157.48) LP(6559.06,6874.02)

## Via types
v1: diameter 23.62, hole 11.81, Top Layer to Bottom Layer, 614 vias
v2: diameter 15.75, hole 5.91, Top Layer to Bottom Layer, 214 vias
v3: diameter 78.74, hole 47.24, Top Layer to Bottom Layer, 101 vias
v4: diameter 35.43, hole 19.68, Top Layer to Bottom Layer, 59 vias
v5: diameter 19.68, hole 7.87, Top Layer to Bottom Layer, 32 vias

## Nets (pads, with @x,y where several pads share a name; then routed paths per layer and width w, separated by ;. In a path a pad name is that pad's centre, name@x,y a point inside that pad or via, vN(x,y) a via of type N, cw(c..) or ccw(c..) an arc to the next point about the centre after c; other vN are vias at no path point)
+5V: C123.1 C124.1 C125.1 HDR1.97 HDR1.99 HDR2.97 HDR2.99 TP8.1 U10.1 U11.3 | length 6083.9
  Top Layer w7.87: C124.1@5568.9,6905.51 v3@5568.9,6970.47
  Top Layer w15.75: C123.1@6169.29,6421.26 v4(6196.85,6393.7) ; C123.1@6185.04,6460.63 6185.04,6456.69 6185.04,6440.95 6214.57,6411.42 v4(6232.28,6393.7) ; C123.1@6196.85,6464.57 6204.73,6464.57 v4(6248.03,6421.26) ; C125.1@6200.79,4456.69 C125.1@6200.79,4433.07 ; v4(6165.36,4397.64) 6183.07,4415.35 C125.1@6200.79,4433.07 ; v4(6165.36,4397.64) v4(6200.79,4397.64) ; v4(6165.36,4397.64) v4(6165.36,4362.21) v4(6200.79,4362.21) v4(6200.79,4397.64) ; v4(6200.79,4397.64) C125.1@6200.79,4433.07
  MidLayer1 w7.87: TP8.1@4051.18,7169.29 4051.18,7106.3 4027.56,7082.68 4027.56,6106.3 4066.93,6066.93 4066.93,5728.35 4024.68,5686.1 4024.68,5207.6 4078.74,5153.54 4110.24,5153.54 4665.36,4598.43 5232.28,4598.43 5574.8,4255.91 6094.49,4255.91 v4(6200.79,4362.21)
  Bottom Layer w15.75: HDR2.97@6098.43,4362.21 6129.92,4362.21 v4(6165.36,4362.21) v4(6200.79,4362.21) ; HDR1.97@6098.43,6393.7 6129.92,6393.7 v4(6196.85,6393.7) ; HDR2.97@6102.36,4397.64 6129.92,4397.64 v4(6165.36,4397.64) v4(6200.79,4397.64) ; HDR1.97@6102.36,6374.02 6129.92,6374.02 6196.85,6374.02 6212.6,6374.02 6214.57,6375.98 v4(6232.28,6393.7) ; v4@6224.41,6405.51 v4@6240.16,6421.26 ; v4(6196.85,6393.7) 6214.57,6411.42 6224.41,6421.26 v4@6240.16,6421.26 ; v4(6196.85,6393.7) v4(6232.28,6393.7) ; v4(6232.28,6393.7) 6248.03,6409.45 v4(6248.03,6421.26) v4@6240.16,6421.26
  Bottom Layer w39.37: v3(5496.06,7039.37) U11.3@5570.87,7039.37 ; v3(5570.87,6972.44) U11.3@5570.87,7039.37 ; v3(5657.48,6972.44) U11.3@5657.48,7039.37 ; v3(5724.41,7039.37) U11.3@5657.48,7039.37 ; U11.3@5570.87,7039.37 5610.24,7039.37 U11.3@5657.48,7039.37
A0: U1.F19 U5.32 U7.H7 U9.H7 | length 2125.3
  Top Layer w5: U1.F19@5031.5,5637.8 v1(5051.18,5657.48) ; U5.32@5748.03,5685.04 5783.47,5685.04 5811.02,5657.48 v2(5826.77,5657.48)
  MidLayer1 w5: v2(5826.77,5657.48) 6003.94,5480.32 6003.94,5311.02 6023.62,5291.34 v2(6023.62,5196.85)
  MidLayer2 w5: v2(6023.62,5196.85) 6039.37,5212.6 6066.93,5212.6 6114.17,5259.84 6352,5259.84 6375.62,5236.22 6405.51,5236.22 6425.2,5216.54 v2(6425.2,5212.6)
  Bottom Layer w5: v1(5051.18,5657.48) 5070.87,5637.8 5129.92,5637.8 5149.61,5657.48 5299.21,5657.48 5326.77,5629.92 5799.21,5629.92 v2(5826.77,5657.48) ; v2(6023.62,5196.85) 6078.74,5141.73 U7.H7@6090.55,5141.73 ; v2(6425.2,5212.6) 6493.94,5143.86 U9.H7@6505.75,5143.86 ; U9.H7@6505.75,5141.73 U9.H7@6507.88,5141.73
A1: U1.R18 U5.31 U7.H8 U8.G2 U9.H8 | length 2653.7
  Top Layer w5: U1.R18@4992.13,5283.47 v1(5011.81,5303.15) ; U5.31@5748.03,5700.79 5795.28,5700.79 5811.02,5685.04 v2(5826.77,5685.04)
  MidLayer1 w5: v1(5011.81,5303.15) 5031.5,5322.84 5110.24,5322.84 5133.86,5299.21 5381.89,5299.21 5413.39,5267.72 5531.5,5267.72 5594.49,5204.72 v2(5637.8,5204.72) ; v2(5826.77,5685.04) 6013.94,5497.87 6013.94,5316.77 6039.37,5291.34 6039.37,5220.47 6047.25,5212.6 v2(6047.25,5196.85)
  MidLayer2 w5: v2(5637.8,5204.72) 5639.4,5204.72 5842.52,5407.84 5842.52,5669.29 v2(5826.77,5685.04) ; v2(6047.25,5196.85) 6066.93,5196.85 6118.11,5248.03 6349.67,5248.03 6377.23,5220.47 v2(6397.64,5220.47)
  Bottom Layer w5: U8.G2@5598.43,5204.72 5618.11,5204.72 v2(5637.8,5204.72) ; v2(6047.25,5196.85) 6066.93,5177.17 6066.93,5173.23 6082.68,5157.48 6106.3,5157.48 U7.H8@6122.05,5141.73 ; v2(6397.64,5220.47) 6405.51,5228.35 6433.07,5228.35 6477.79,5183.63 6477.79,5179.69 6500,5157.48 6523.62,5157.48 U9.H8@6539.37,5141.73
A2: U1.T22 U5.30 U7.J8 U8.F2 U9.J8 | length 2446.6
  Top Layer w5: U1.T22@5149.61,5244.09 5196.85,5244.09 5204.73,5251.97 5433.07,5251.97 5448.82,5236.22 v2(5637.8,5236.22) ; U5.30@5748.03,5716.54 5803.15,5716.54 5811.02,5708.66 v2(5826.77,5708.66)
  MidLayer1 w5: v2(5826.77,5708.66) 6023.94,5511.5 6023.94,5322.52 6059.06,5287.4 v2(6059.06,5228.35)
  MidLayer2 w5: v2(5637.8,5236.22) 5656.76,5236.22 5832.52,5411.99 5832.52,5628.11 5811.02,5649.61 5811.02,5692.91 v2(5826.77,5708.66) ; v2(6059.06,5228.35) 6135.67,5304.96 6321.03,5304.96 6374.02,5251.97 6448.82,5251.97 v2(6480.32,5220.47)
  Bottom Layer w5: U8.F2@5598.43,5236.22 5614.9,5236.22 v2(5637.8,5236.22) v2@5630.65,5236.22 ; v2(6059.06,5228.35) 6086.62,5228.35 6122.05,5192.91 U7.J8@6122.05,5173.23 ; v2(6480.32,5220.47) 6492.13,5220.47 U9.J8@6539.37,5173.23
A3: U1.R21 U5.29 U7.J7 U8.E2 U9.J7 | length 2442.9
  Top Layer w5: U1.R21@5110.24,5283.47 5129.92,5303.15 5177.17,5303.15 5220.47,5346.46 5437.01,5346.46 5458.82,5324.65 5545.43,5324.65 5602.36,5267.72 v2(5653.54,5267.72) ; U5.29@5748.03,5732.28 5779.53,5732.28 5782.86,5728.96 5827.38,5728.96 v2(5830.71,5732.28)
  MidLayer1 w5: v2(5830.71,5732.28) 6033.94,5529.06 6033.94,5328.27 6090.55,5271.65 v2(6090.55,5196.85)
  MidLayer2 w5: v2(5653.54,5267.72) 5674.11,5267.72 5822.52,5416.13 5822.52,5622.36 5799.21,5645.67 5799.21,5704.72 5826.77,5732.28 v2(5830.71,5732.28) ; v2(6090.55,5196.85) 6129.92,5236.22 6347.34,5236.22 6378.83,5204.72 6409.45,5204.72 6417.32,5196.85 v2(6488.19,5196.85)
  Bottom Layer w5: U8.E2@5598.43,5267.72 v2(5653.54,5267.72) ; U7.J7@6090.55,5173.23 v2(6090.55,5196.85) ; v2(6488.19,5196.85) 6500,5185.04 6500,5181.1 U9.J7@6507.88,5173.23
A4: U1.M22 U5.27 U7.J3 U8.C2 U9.J3 | length 2493.5
  Top Layer w5: U1.M22@5149.61,5401.58 5177.17,5401.58 5194.73,5419.13 5596.62,5419.13 5677.17,5338.58 v2(5677.17,5314.96) ; U5.27@5779.53,5763.78 5792.63,5750.68 5792.63,5746.74 5799.21,5740.16 5814.96,5740.16 v2(5830.71,5755.91)
  MidLayer1 w5: v2(5830.71,5755.91) 5809.84,5735.04 5809.84,5622.05 5964.02,5467.87 5964.02,5336.8 6007.88,5292.94 v2(6007.88,5267.72)
  MidLayer2 w5: v2(5677.17,5314.96) 5779.53,5417.32 5779.53,5699.18 5814.96,5734.62 5814.96,5740.16 v2(5830.71,5755.91) ; v2(6007.88,5267.72) 6066.93,5326.77 6346.46,5326.77 v2(6405.51,5267.72)
  Bottom Layer w5: U8.C2@5598.43,5330.71 5661.42,5330.71 v2(5677.17,5314.96) ; U7.J3@5964.57,5173.23 5964.57,5224.41 v2(6007.88,5267.72) ; U9.J3@6381.89,5173.23 6381.89,5232.28 6405.51,5255.91 v2(6405.51,5267.72)
A5: U1.N21 U5.26 U7.J2 U8.D2 U9.J2 | length 2524.5
  Top Layer w5: U1.N21@5110.24,5362.21 5129.92,5381.89 5177.17,5381.89 5204.41,5409.13 5579.06,5409.13 5657.48,5330.71 v2(5657.48,5299.21) ; U5.26@5748.03,5779.53 5783.47,5779.53 v2(5807.09,5755.91) ; v2@5805.27,5754.69 v2@5807.09,5751.97
  MidLayer1 w5: v2(5807.09,5755.91) 5799.84,5748.66 5799.84,5617.91 5954.02,5463.73 5954.02,5297.09 5964.57,5286.54 v2(5964.57,5267.72)
  MidLayer2 w5: v2(5657.48,5299.21) 5657.48,5318.9 5769.53,5430.95 5769.53,5703.32 5803.15,5736.95 5803.15,5742.49 5807.09,5746.43 v2(5807.09,5755.91) ; v2(5964.57,5267.72) 5980.32,5251.97 6039.37,5251.97 6102.36,5314.96 6334.65,5314.96 v2(6381.89,5267.72)
  Bottom Layer w5: U8.D2@5598.43,5299.21 v2(5657.48,5299.21) ; U7.J2@5933.07,5173.23 5933.07,5236.22 v2(5964.57,5267.72) ; U9.J2@6350.4,5173.23 6350.4,5236.22 v2(6381.89,5267.72)
A6: U1.L17 U5.25 U7.H3 U8.F3 U9.H3 | length 2911.5
  Top Layer w5: U1.L17@4952.76,5440.95 v1(4972.44,5460.63) ; U5.25@5748.03,5795.28 5783.47,5795.28 5795.28,5783.47 5811.03,5783.47 5818.9,5791.34 v2(5826.77,5791.34)
  MidLayer1 w5: v1(4972.44,5460.63) 4992.13,5480.32 5110.24,5480.32 5161.42,5429.13 5366.14,5429.13 5480.32,5314.96 5551.18,5314.96 5618.11,5248.03 v2(5618.11,5220.47) ; v2(5826.77,5791.34) 5817.4,5791.34 5789.84,5763.78 5789.84,5613.76 5944.02,5459.59 5944.02,5262.89 6004.25,5202.65 6004.25,5192.6 6011.81,5185.04 v2(6011.81,5165.35)
  MidLayer2 w5: v2(5618.11,5220.47) 5618.11,5255.91 5641.73,5279.53 5641.73,5318.9 5759.53,5436.69 5759.53,5606.3 5759.53,5707.47 5791.34,5739.28 5791.34,5766.22 5802.47,5777.35 5812.78,5777.35 v2(5826.77,5791.34) ; v2(6011.81,5165.35) 6096.82,5165.35 6122.05,5190.58 6122.05,5200.06 6134.59,5212.6 6342.68,5212.6 6385.98,5169.29 v2(6417.32,5169.29)
  Bottom Layer w5: U8.F3@5566.93,5236.22 5582.68,5220.47 v2(5618.11,5220.47) ; U7.H3@5964.57,5141.73 5988.19,5141.73 v2(6011.81,5165.35) ; U9.H3@6381.89,5141.73 6401.58,5141.73 6417.32,5157.48 v2(6417.32,5169.29)
A7: U1.N22 U5.24 U7.H2 U8.E3 U9.H2 | length 2596.7
  Top Layer w5: U1.N22@5149.61,5362.21 5177.17,5362.21 5214.1,5399.13 5537.88,5399.13 5622.05,5314.96 v2(5622.05,5283.47) ; U5.24@5748.03,5811.02 5791.34,5811.02 v2(5803.15,5799.21)
  MidLayer1 w5: v2(5803.15,5799.21) 5779.84,5775.91 5779.84,5609.62 5934.02,5455.45 5934.02,5258.74 5992.13,5200.63 v2(5992.13,5181.1)
  MidLayer2 w5: v2(5622.05,5283.47) 5622.05,5314.96 5749.53,5442.44 5749.53,5711.61 5781.34,5743.42 5781.34,5777.4 v2(5803.15,5799.21) ; v2(5992.13,5181.1) 6098.43,5181.1 6110.24,5192.91 6110.24,5202.39 6132.25,5224.41 6345.01,5224.41 6380.44,5188.98 v2(6401.58,5188.98)
  Bottom Layer w5: U8.E3@5566.93,5267.72 5582.68,5283.47 v2(5622.05,5283.47) ; U7.H2@5933.07,5141.73 5948.82,5157.48 5980.32,5157.48 5992.13,5169.29 v2(5992.13,5181.1) ; U9.H2@6350.4,5141.73 6366.14,5157.48 6393.7,5157.48 6401.58,5165.35 v2(6401.58,5188.98)
A8: U1.J17 U5.22 U7.H1 U8.C3 U9.H1 | length 2612.3
  Top Layer w5: U1.J17@4952.76,5519.69 v1(4972.44,5539.37) ; v2(5700.79,5842.52) U5.22@5748.03,5842.52
  MidLayer1 w5: v1(4972.44,5539.37) 4992.13,5559.06 5110.24,5559.06 5188.98,5480.32 5480.32,5480.32 v2(5566.93,5393.7) ; v2(5700.79,5842.52) 5726.54,5816.77 5726.54,5537.24 5884.02,5379.76 5884.02,5238.03 5933.07,5188.98 5933.07,5141.73 v2(5917.32,5125.98)
  MidLayer2 w5: v2(5566.93,5393.7) 5637.17,5463.94 5637.17,5794.65 5685.04,5842.52 v2(5700.79,5842.52) ; v2(5917.32,5125.98) 5930.95,5139.61 6027.56,5139.61 6033.31,5145.35 6125.67,5145.35 v2(6137.8,5157.48)
  Bottom Layer w5: U8.C3@5566.93,5330.71 v2(5566.93,5393.7) ; U7.H1@5901.58,5141.73 v2(5917.32,5125.98) ; v2(6137.8,5157.48) 6137.8,5133.86 6145.67,5125.98 6303.15,5125.98 U9.H1@6318.9,5141.73
A9: U1.K17 U5.21 U7.G3 U8.D6 U9.G3 | length 2693.8
  Top Layer w5: U1.K17@4952.76,5480.32 v1(4972.44,5500) ; v2(5700.79,5866.14) 5708.66,5858.27 U5.21@5748.03,5858.27
  MidLayer1 w5: v1(4972.44,5500) 4992.13,5519.69 5110.24,5519.69 5173.23,5456.69 5389.77,5456.69 v2(5472.44,5374.02) ; v2(5700.79,5866.14) 5736.54,5830.39 5736.54,5541.39 5894.02,5383.91 5894.02,5242.17 5943.07,5193.12 5943.07,5155.35 v2(5988.19,5110.24)
  MidLayer2 w5: v2(5472.44,5374.02) 5472.44,5442.55 5623.23,5593.34 5623.23,5800.39 5688.98,5866.14 v2(5700.79,5866.14) ; v2(5988.19,5110.24) 6019.69,5110.24 6027.56,5102.36 6066.93,5102.36 6076.3,5111.73 6189.39,5111.73 6220.88,5143.23 6355.48,5143.23 6380.6,5118.11 v2(6401.58,5118.11)
  Bottom Layer w5: U8.D6@5472.44,5299.21 5456.69,5314.96 5456.69,5358.27 v2(5472.44,5374.02) ; U7.G3@5964.57,5110.24 v2(5988.19,5110.24) ; U9.G3@6381.89,5110.24 6389.77,5118.11 v2(6401.58,5118.11)
A10: U1.P21 U5.20 U7.H9 U8.C6 U9.H9 | length 2604.3
  Top Layer w5: U1.P21@5110.24,5322.84 5129.92,5342.52 5177.17,5342.52 5204.73,5370.08 5452.76,5370.08 v2(5472.44,5350.39) ; U5.20@5748.03,5874.02 5783.47,5874.02 5795.28,5885.83 v2(5795.28,5905.51)
  MidLayer1 w5: v2(5795.28,5905.51) 5846.46,5854.33 5846.46,5751.97 6043.94,5554.49 6043.94,5334.02 6153.54,5224.41 6153.54,5177.17 v2(6173.23,5157.48)
  MidLayer2 w5: v2(5472.44,5350.39) 5492.13,5330.71 5529.17,5330.71 5647.17,5448.71 5647.17,5784.96 5688.98,5826.77 5716.54,5826.77 v2(5795.28,5905.51) ; v2(6173.23,5157.48) 6188.98,5173.23 6367.9,5173.23 6387.59,5153.54 6429.14,5153.54 6440.95,5165.35 6519.69,5165.35 6527.56,5157.48 v2(6555.12,5157.48)
  Bottom Layer w5: U8.C6@5472.44,5330.71 v2(5472.44,5350.39) ; U7.H9@6153.54,5141.73 v2(6173.23,5157.48) ; v2(6555.12,5157.48) U9.H9@6570.87,5141.73